# Altium PCB Arrow-ESC.PcbDoc (part 1 of 2)
Units mm, origin at the board's own origin, x right, y up, seen from the top; angles counter-clockwise.
Board outline 52 x 35 mm, 6 copper layers (Top Layer (SIG), Int1 (GND), Int2 (PWR), Int3 (SIG), Int4 (GND), Bottom Layer (SIG)), stack 1.481 mm thick; 87 components, 67 nets, 323 pads, 413 vias.
Unrouted connection lines stored in the file: 43.
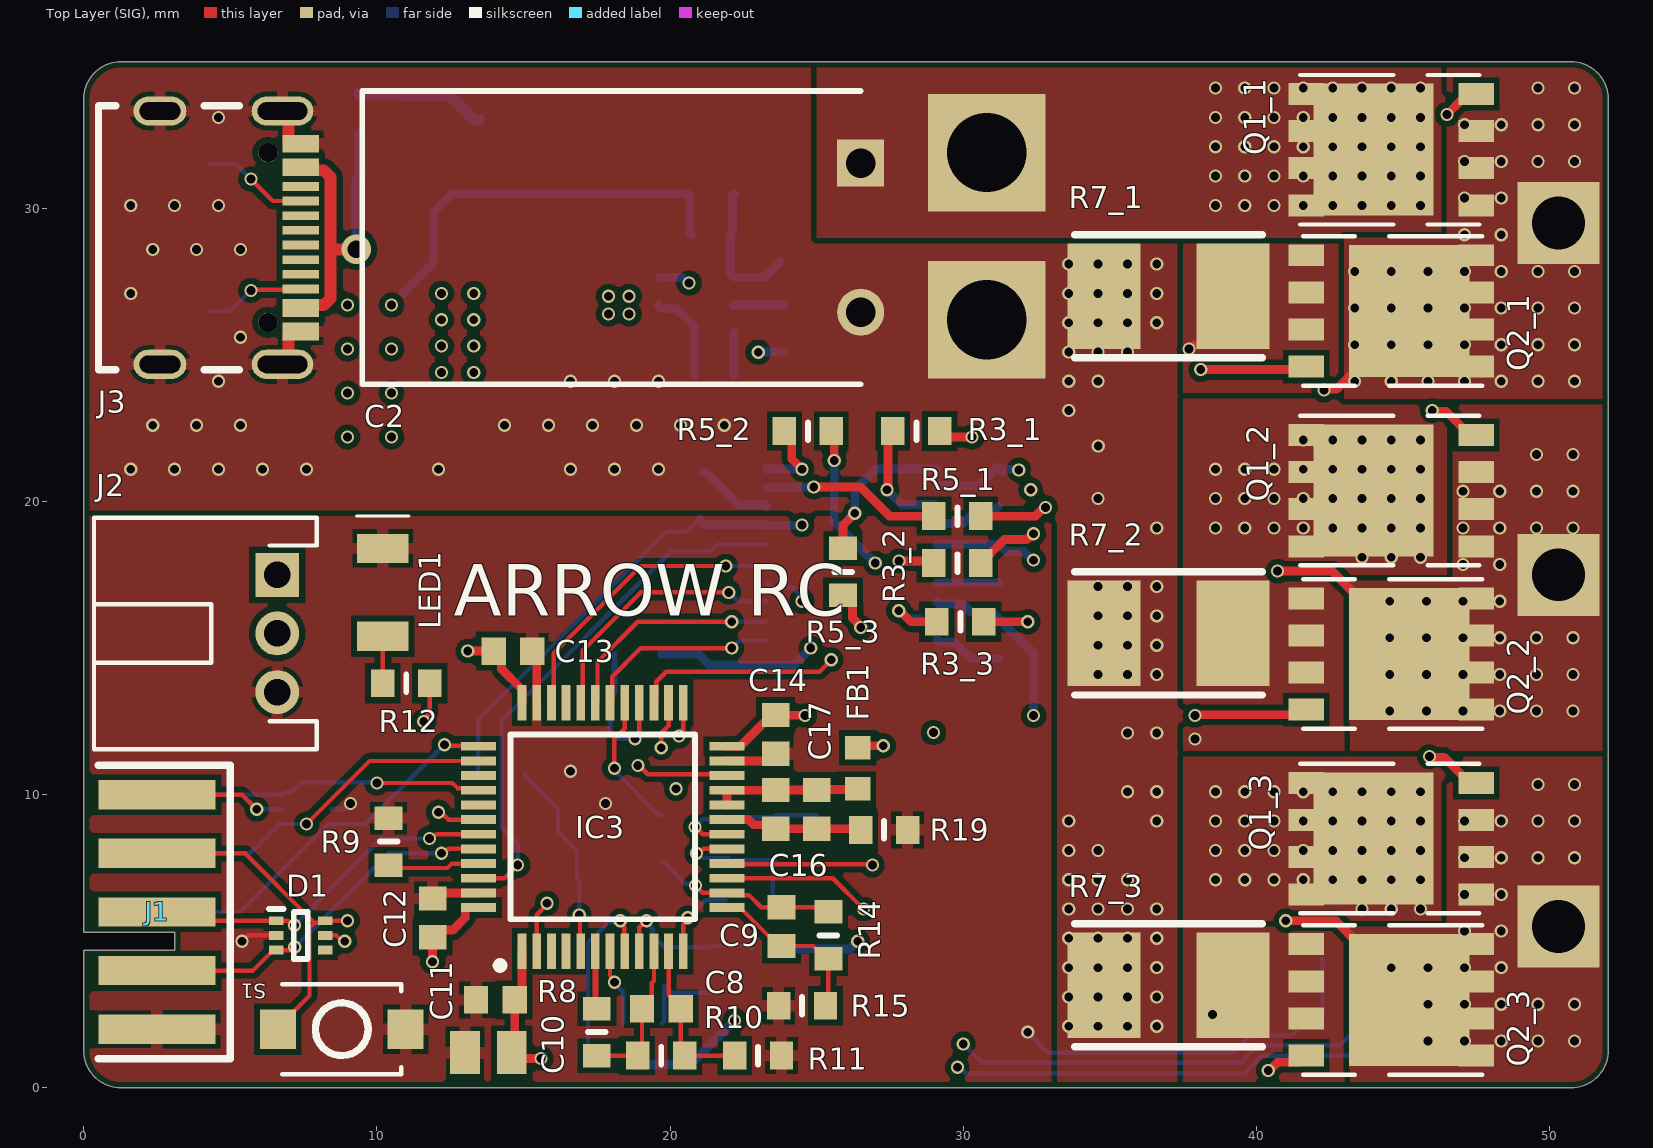
[diagram p0: Top Layer (SIG) view]
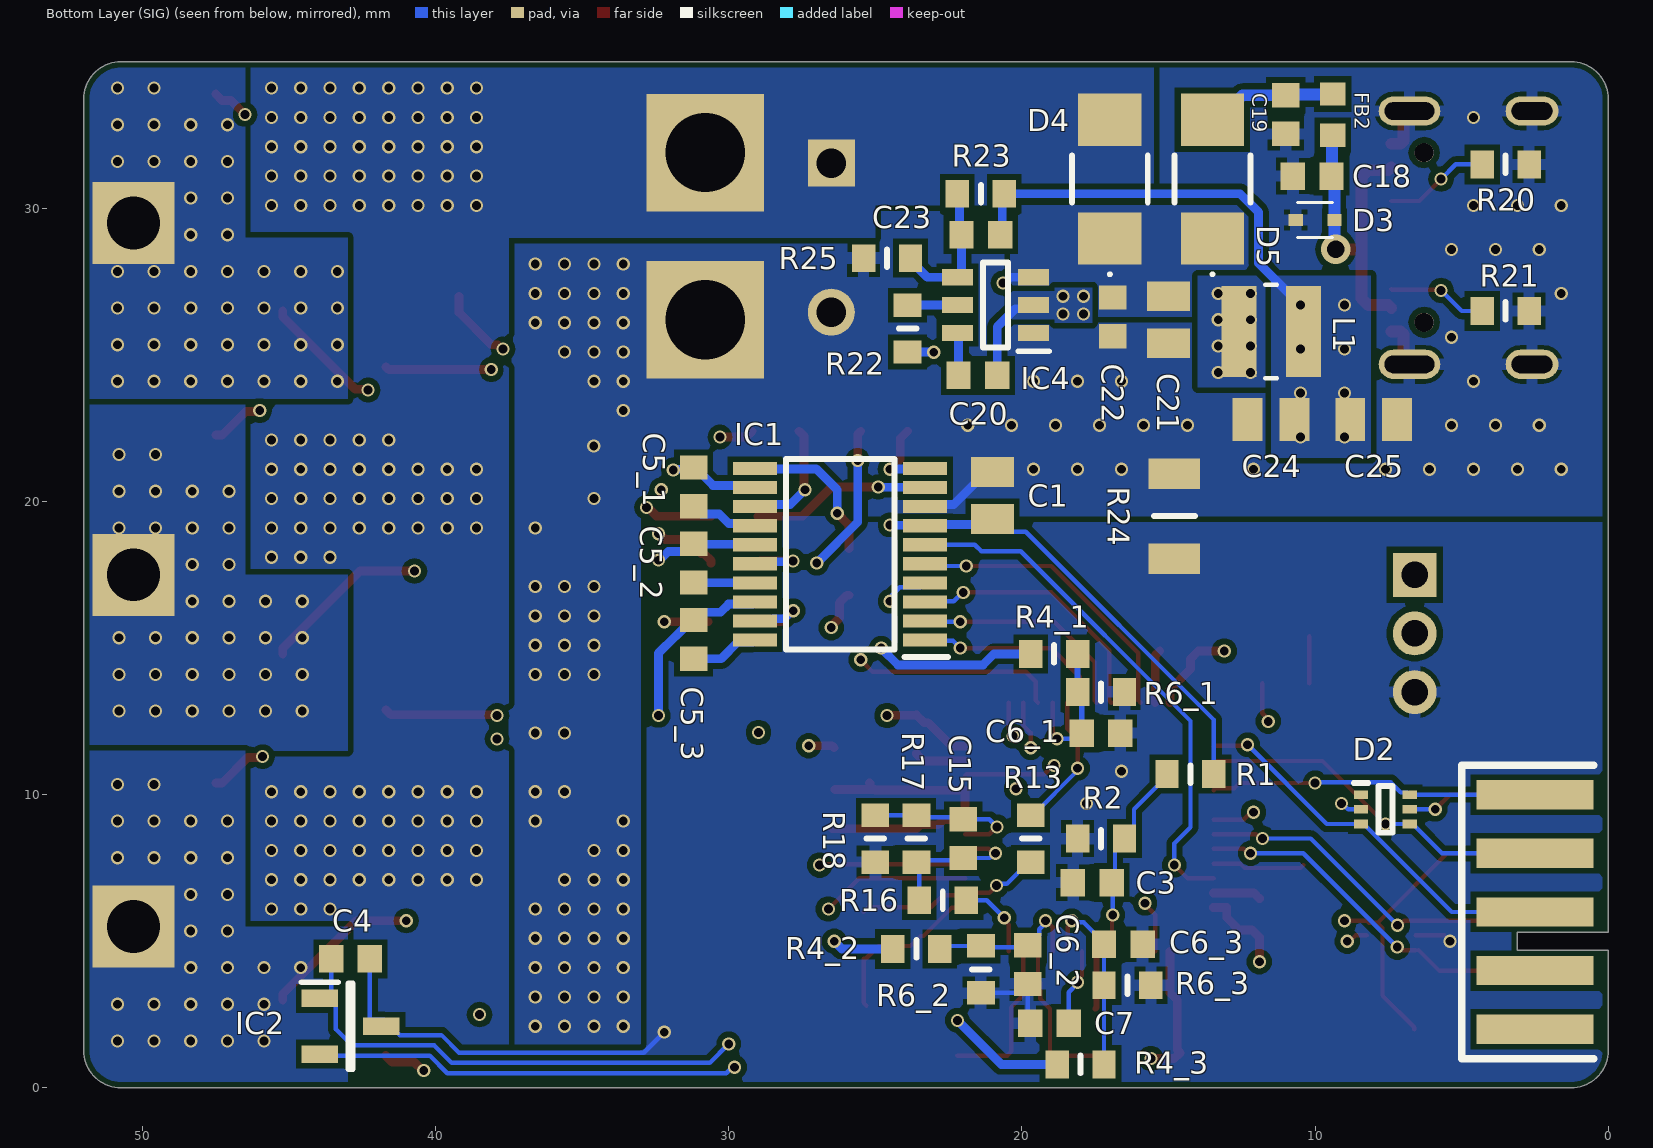
[diagram p1: Bottom Layer (SIG) view, seen from below]
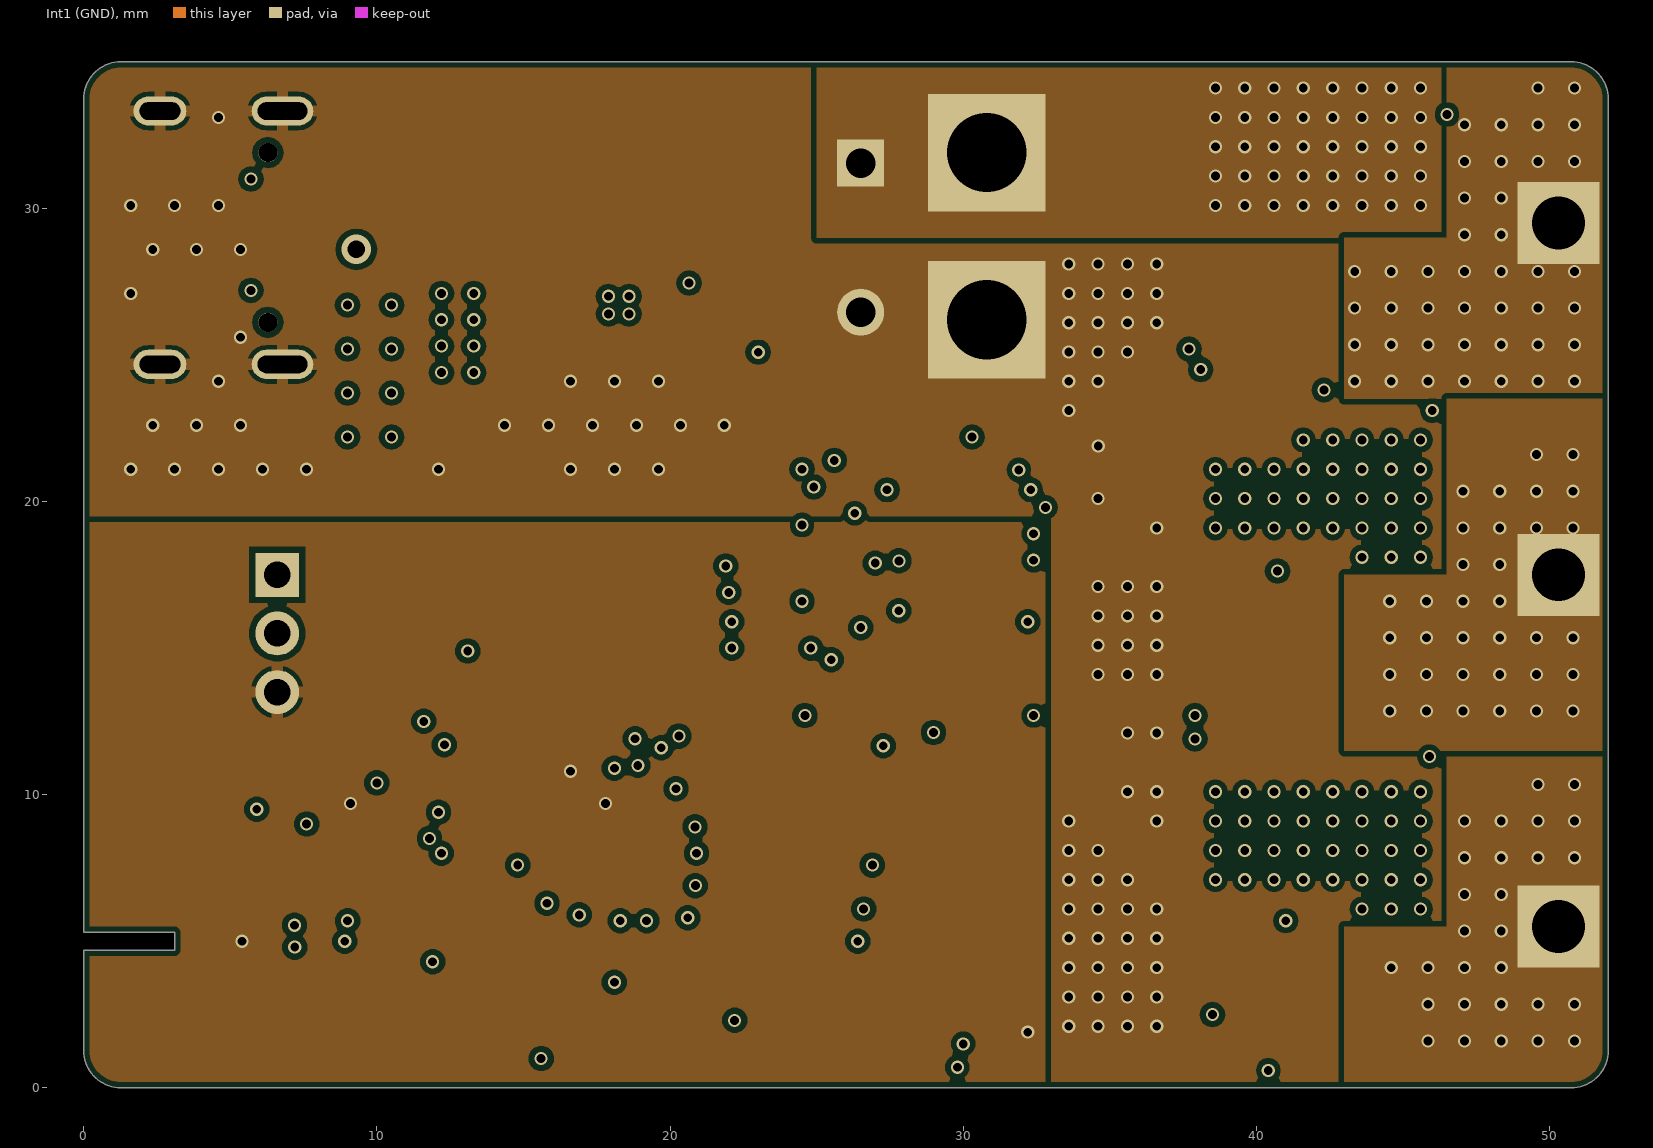
[diagram p2: Int1 (GND)]
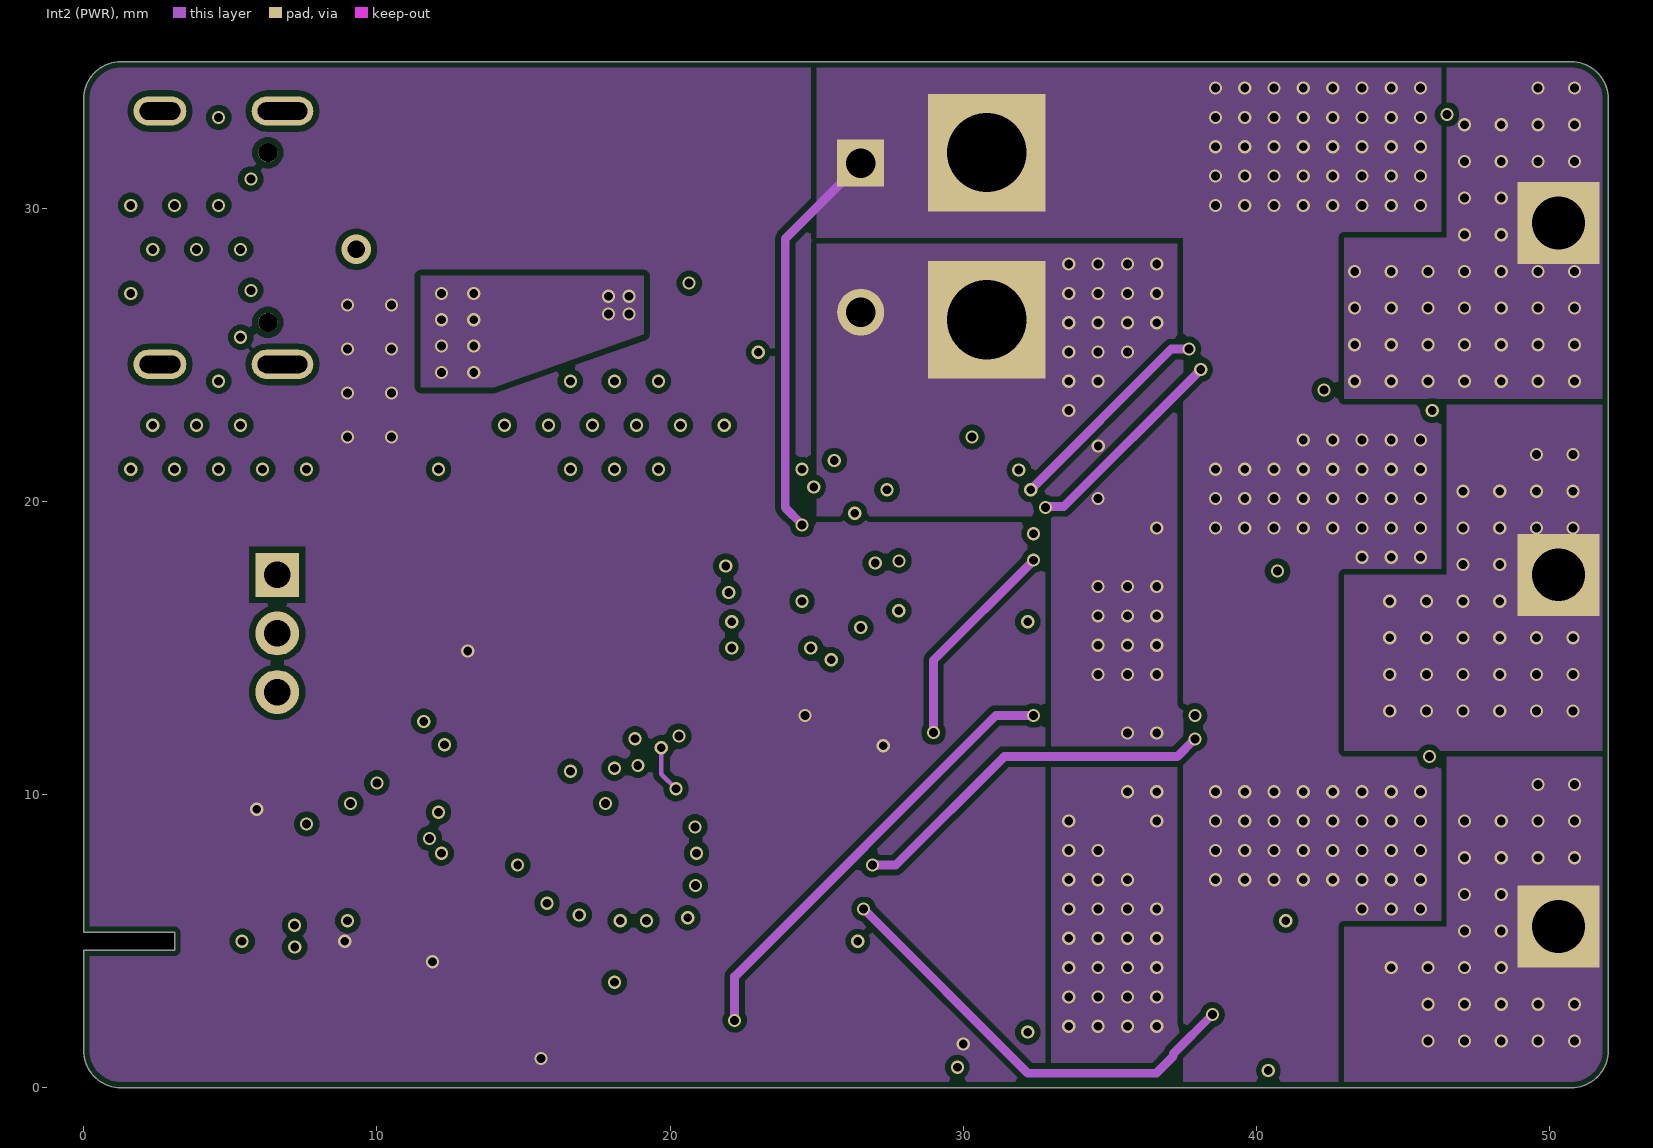
[diagram p3: Int2 (PWR)]
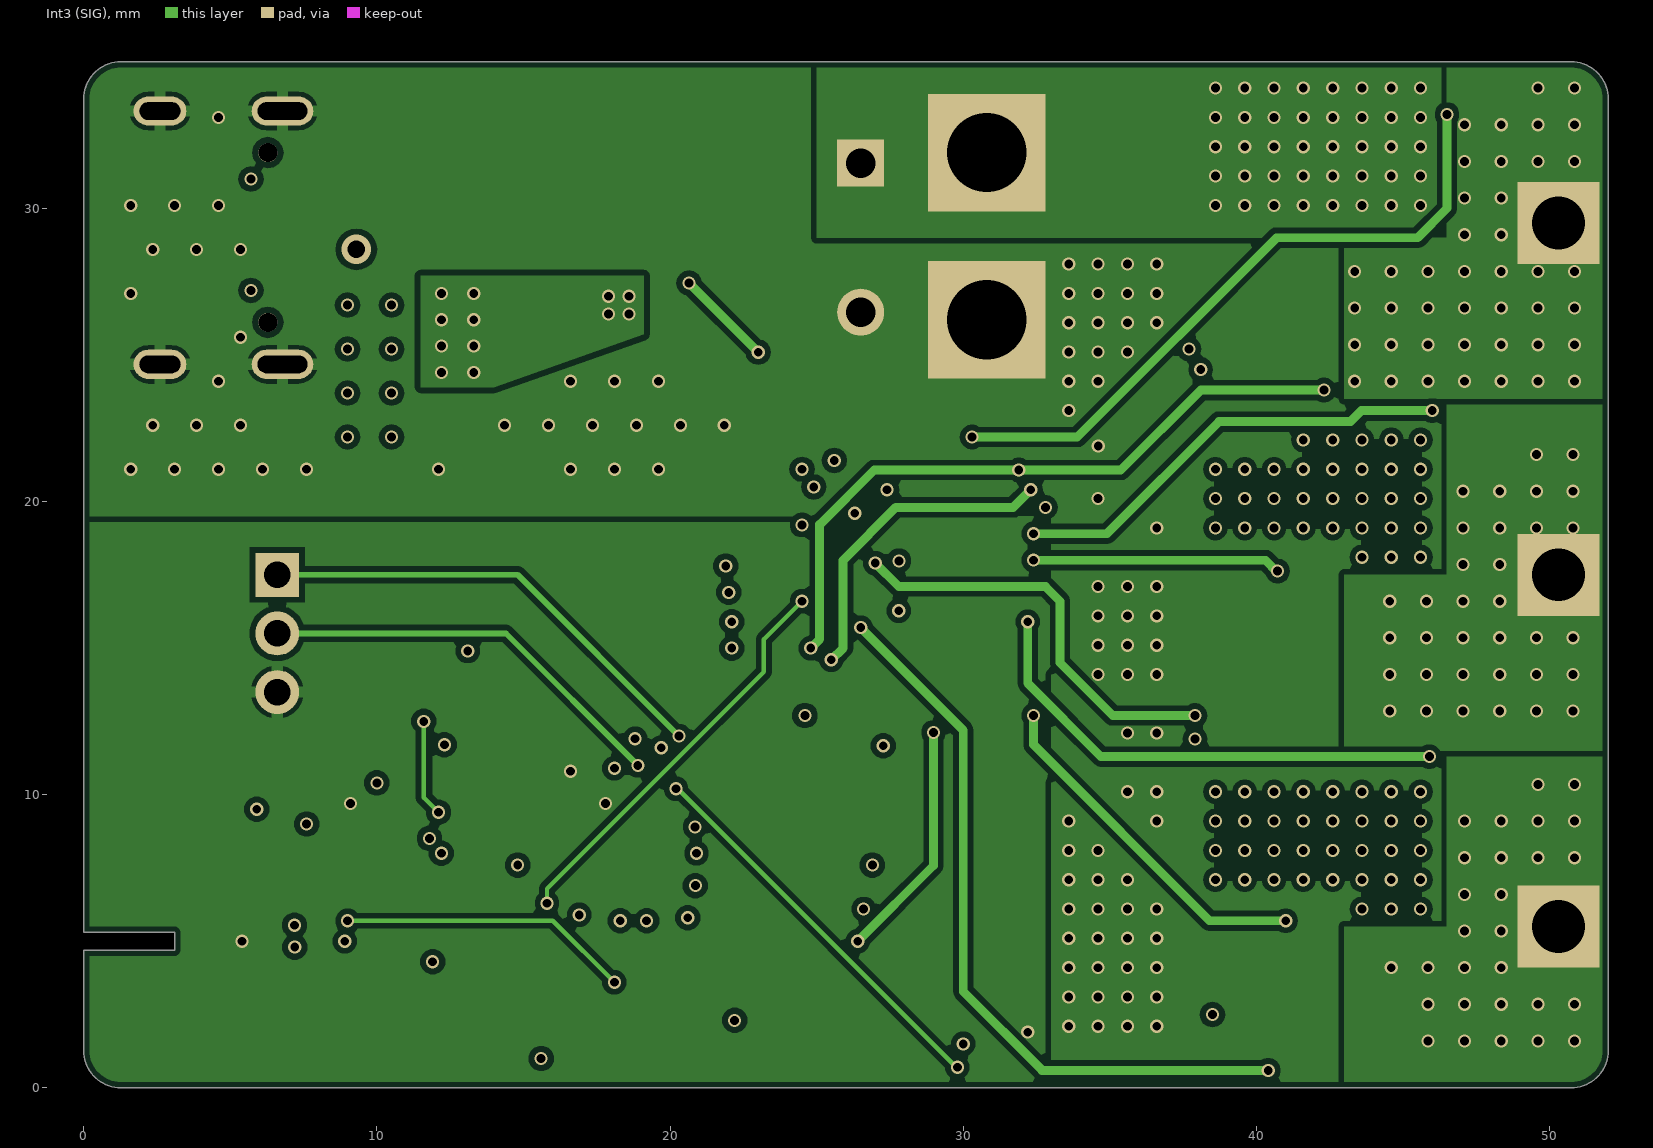
[diagram p4: Int3 (SIG)]
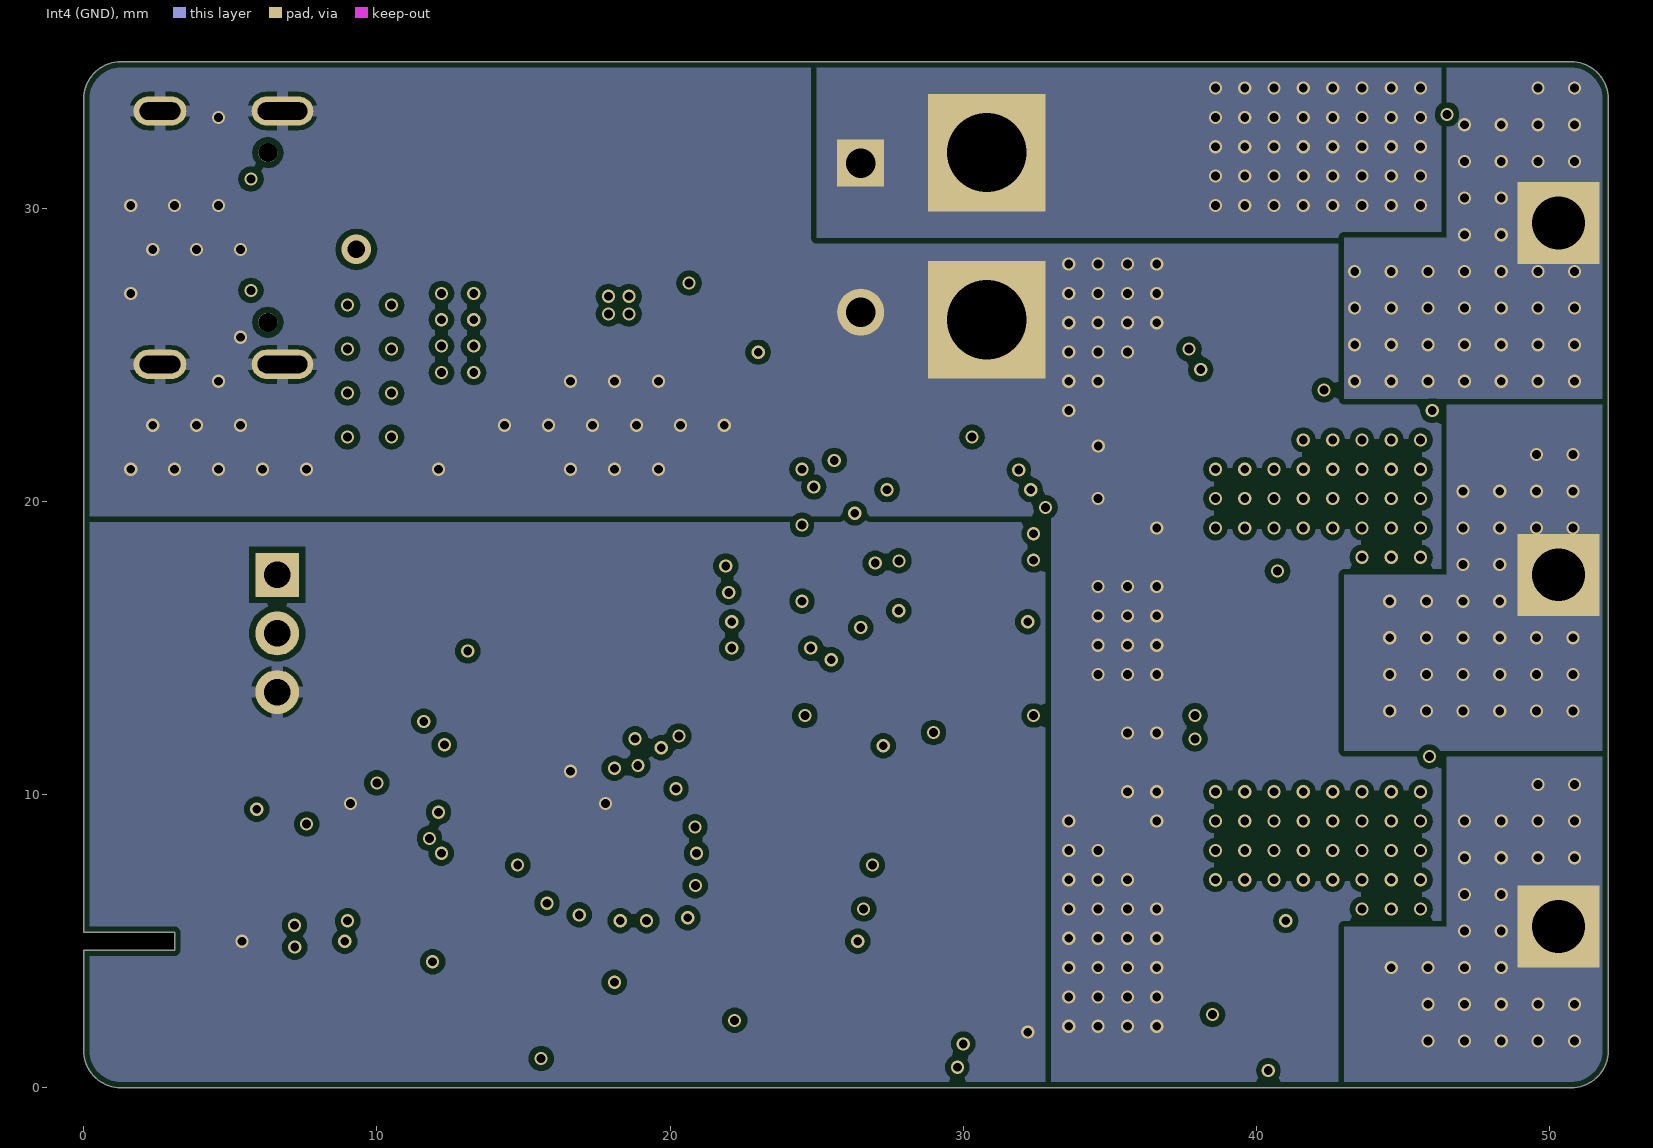
[diagram p5: Int4 (GND)]
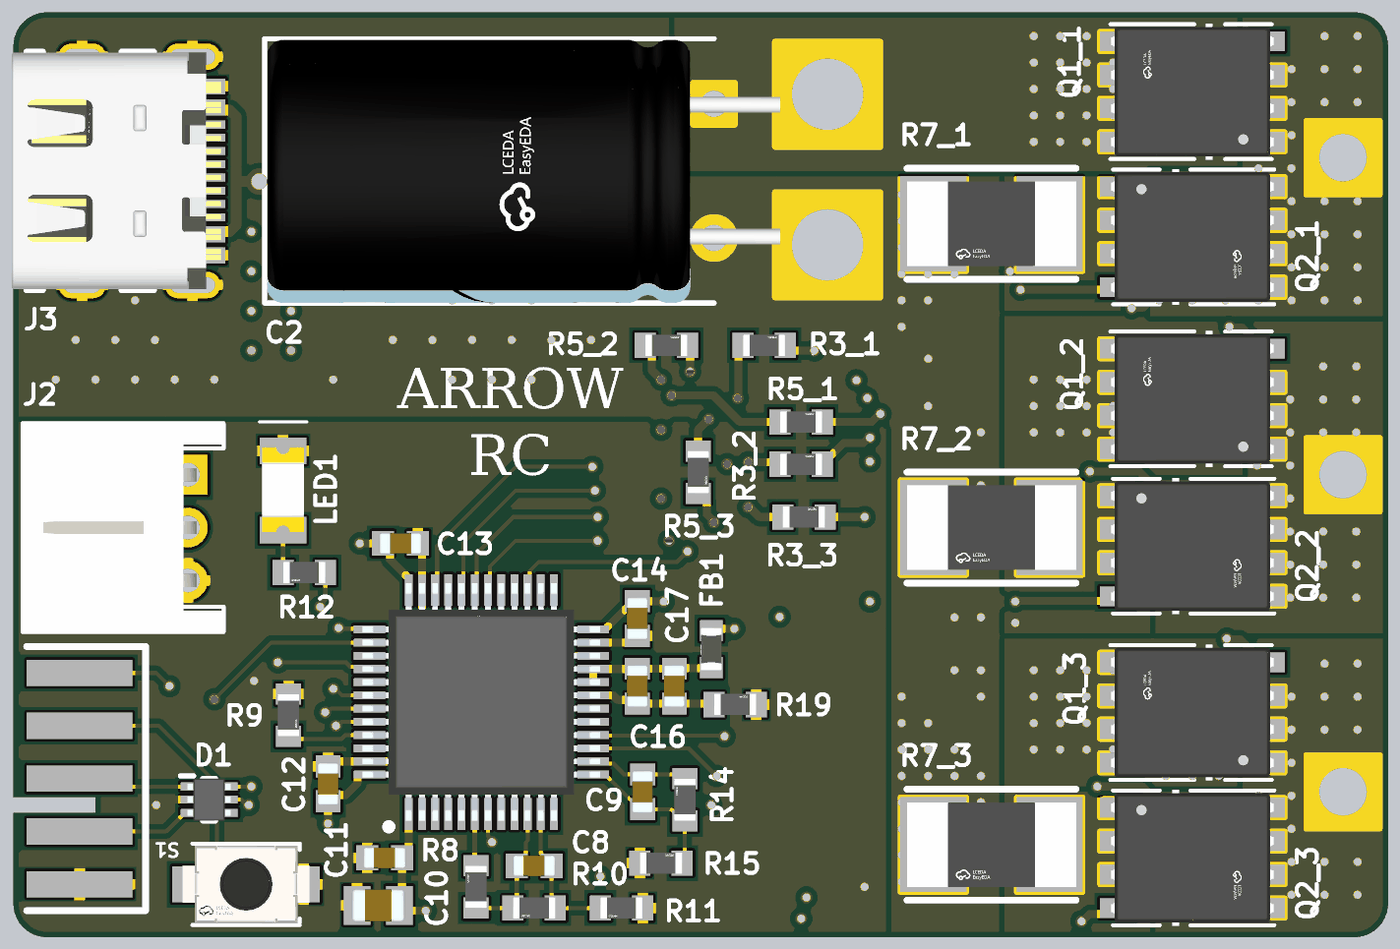
[diagram p6: 3D render of the assembled board from above, using the file's embedded part models]
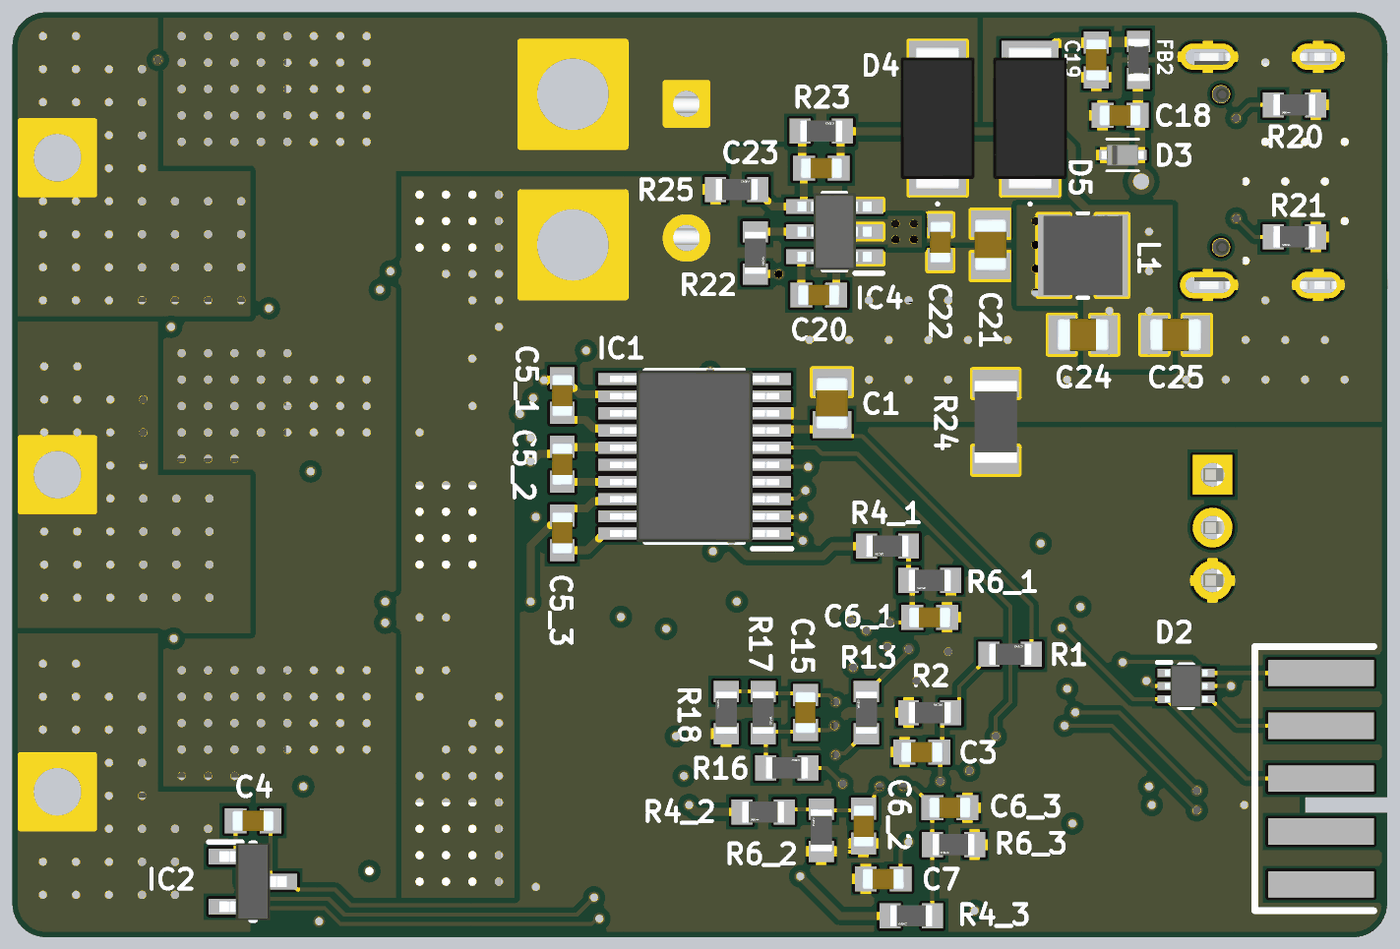
[diagram p7: 3D render of the assembled board from below, using the file's embedded part models]

## Layer stack, top to bottom
Top Solder: solder mask 0.0254, SM-001, Dk 4
Top Layer (SIG): signal copper 0.035
Dielectric 1: prepreg 0.0711, PP-006, Dk 4.1
Dielectric 2: prepreg 0.0711, PP-006, Dk 4.1
Int1 (GND): signal copper 0.0175
Dielectric 3: core 0.4572, Core-035, Dk 4.7
Int2 (PWR): signal copper 0.0175
Dielectric 4: prepreg 0.0711, PP-006, Dk 4.1
Dielectric 5: prepreg 0.0711, PP-006, Dk 4.1
Int3 (SIG): signal copper 0.0175
Dielectric 6: core 0.4572, Core-035, Dk 4.7
Int4 (GND): signal copper 0.0175
Dielectric 7: prepreg 0.0711, PP-006, Dk 4.1
Dielectric 8: prepreg 0.0711, PP-006, Dk 4.1
Bottom Layer (SIG): signal copper 0.035
Bottom Solder: solder mask 0.0254, SM-001, Dk 4

## Board outline
0,1.27 ccw(c1.27,1.27) 1.27,0 50.73,0 ccw(c50.73,1.27) 52,1.27 52,33.73 ccw(c50.73,33.73) 50.73,35 1.27,35 ccw(c1.27,33.73) 0,33.73 0,5.3 3.1,5.3 3.1,4.7 0,4.7

## Design rules (kind name [scope] priority, off if disabled: settings)
BoardOutlineClearance [All] p1: gap=0.2 ignorepadtopadclearanceinfootprint=FALSE
Clearance "Stitching NetC15_1" [IsStitchingVia and InNet('NetC15_1') vs (IsVia and (Not IsStitchingVia)) Or IsPad] p1: gap=0 ignorepadtopadclearanceinfootprint=FALSE
Clearance [All] p2: gap=0.2 ignorepadtopadclearanceinfootprint=TRUE
HoleSize [All] p1: absolutevalues=TRUE maxlimit=5 minlimit=0.025 maxpercent=80.000 minpercent=20.000
MinimumSolderMaskSliver [All] p1: minsoldermaskwidth=0.1
PolygonConnect PolygonConnect_2 [All vs isVia] p1: connectstyle=Direct reliefconductorwidth=0.254 reliefentries=4 polygonreliefangle="90 Angle" airgapwidth=0.254
PolygonConnect PolygonConnect_4 [(InNet('PGND') AND (InComponent('J3') OR InComponent('R25') OR InComponent('R20') OR InComponent('R21') OR InComponent('D3') OR InComponent('C19') OR InComponent('C18')))] p2: connectstyle=Relief reliefconductorwidth=0.4 reliefentries=4 polygonreliefangle="90 Angle" airgapwidth=0.15
PolygonConnect PolygonConnect_1 [InNetClass('High-Current')] p3: connectstyle=Direct reliefconductorwidth=0.254 reliefentries=4 polygonreliefangle="90 Angle" airgapwidth=0.254
PolygonConnect [(InNet('NetC20_1') OR InNet('NetC21_2') OR (InNet('+3V3') AND InComponent('C25') OR InComponent('C24') OR InComponent('L1')) OR InComponent('R24'))] p4: connectstyle=Direct reliefconductorwidth=0.254 reliefentries=4 polygonreliefangle="90 Angle" airgapwidth=0.127
PolygonConnect PolygonConnect_3 [All] p5: connectstyle=Relief reliefconductorwidth=0.4 reliefentries=4 polygonreliefangle="90 Angle" airgapwidth=0.15
RoutingVias [All] p1: holewidth=0.711 width=0.8 viastyle="Through Hole" minholewidth=0.3 minwidth=0.45 maxholewidth=0.711 maxwidth=1.27
SilkToSolderMaskClearance [IsPad] p1: minsilkscreentomaskgap=0.1 clearancetoexposedcopper=TRUE
SolderMaskExpansion SolderMaskExpansion_1 [IsVia] p1: expansion=0.102 istentingtop=TRUE
SolderMaskExpansion [All] p2: expansion=0.102 istentingtop=FALSE
SupplyNets "Schematic Supply Nets_7" [InNet('+3V3')] p1: voltage=0.000
SupplyNets "Schematic Supply Nets" [InNet('+3V3A')] p2: voltage=0.000
SupplyNets "Schematic Supply Nets_6" [InNet('PGND')] p3: voltage=0.000
SupplyNets "Schematic Supply Nets_5" [InNet('DGND')] p4: voltage=0.000
SupplyNets "Schematic Supply Nets_3" [InNet('AGND')] p5: voltage=0.000
SupplyNets "Schematic Supply Nets_1" [InNet('VBATT')] p6: voltage=0.000
Width [All] p1: maxlimit=0.5 minlimit=0.15 preferedwidth=0.15 minimp=50.000000 maximp=50.000000 favimp=50.000000
27 further rules are at their usual default settings.

## Classes and differential pairs
component class "Top Level": J2
component class "U_Motor Phase2": C5_2 C6_2 Q1_2 Q2_2 R3_2 R4_2 R5_2 R6_2 R7_2
net class High-Current: NetC5_1_1 NetC5_2_1 NetC5_3_1 OPAMP1_VINP OPAMP2_VINP OPAMP3_VINP PGND VBATT
channel class "Motor Phase": "U_Motor Phase1" "U_Motor Phase2" "U_Motor Phase3"
component class "U_Motor Driver": C1 C2 C3 C4 IC1 IC2 R1 R2
component class "U_Motor Phase3": C5_3 C6_3 Q1_3 Q2_3 R3_3 R4_3 R5_3 R6_3 R7_3
component class U_Buck: C18 C19 C20 C21 C22 C23 C24 C25 D3 D4 D5 FB2 IC4 J3 L1 R20 R21 R22 R23 R24 R25
component class "U_Motor Phase1": C5_1 C6_1 Q1_1 Q2_1 R3_1 R4_1 R5_1 R6_1 R7_1
component class U_STM32G4: C7 C8 C9 C10 C11 C12 C13 C14 C15 C16 C17 D1 D2 FB1 IC3 J1 LED1 R8 R9 R10 R11 R12 R13 R14 R15 R16 R17 R18 R19 S1

## Components (designator, comment, footprint, x,y, rotation, side; value= is the part's Value field where it differs from the comment)
C1 "0805,X5R,10uF,25V,10%" CAPC2012X145N 21,20.2 r90 bottom
C2 "1000uF,25V,20%" CAP-TH_BD10.0-P5.00-D1.0-FD 26.5,29 r270 top
C3 "0603,X7R,15nF,50V,10%" CAPC1608X90N 17.6,7 r180 bottom
C4 "0603,X7R,100nF,50V,10%" CAPC1608X90N 42.9,4.4 r0 bottom
C5_1 "0603,X7R,100nF,50V,10%" CAPC1608X90N 31.2,20.5 r270 bottom (schematic designator C5)
C5_2 "0603,X7R,100nF,50V,10%" CAPC1608X90N 31.2,17.9 r270 bottom (schematic designator C5)
C5_3 "0603,X7R,100nF,50V,10%" CAPC1608X90N 31.2,15.3 r270 bottom (schematic designator C5)
C6_1 "0603,X7R,15nF,50V,10%" CAPC1608X90N 17.3,12.1 r0 bottom (schematic designator C6)
C6_2 "0603,X7R,15nF,50V,10%" CAPC1608X90N 19.8,4.2 r90 bottom (schematic designator C6)
C6_3 "0603,X7R,15nF,50V,10%" CAPC1608X90N 16.54,4.9 r0 bottom (schematic designator C6)
C7 "0603,X7R,100nF,50V,10%" CAPC1608X90N 19.06,2.2 r180 bottom
C8 "0603,NP0,120pF,50V,5%" CAPC1608X90N 19.7,2.7 r180 top
C9 "0603,NP0,120pF,50V,5%" CAPC1608X90N 23.8,5.5 r90 top
C10 "0805,X5R,10uF,25V,10%" CAPC2012X145N 13.8,1.2 r0 top
C11 "0603,X7R,100nF,50V,10%" CAPC1608X90N 14.04,3 r0 top
C12 "0603,X7R,100nF,50V,10%" CAPC1608X90N 11.9,5.8 r270 top
C13 "0603,X7R,100nF,50V,10%" CAPC1608X90N 14.64,14.9 r180 top
C14 "0603,X7R,100nF,50V,10%" CAPC1608X90N 23.6,12.06 r90 top
C15 "0603,NP0,120pF,50V,5%" CAPC1608X90N 22,8.5 r270 bottom
C16 "0603,X7R,100nF,50V,10%" CAPC1608X90N 23.6,9.5 r90 top
C17 "0603,X7R,1uF,50V,10%" CAPC1608X90N 25,9.5 r90 top
C18 "0603,X7R,15nF,50V,10%" CAPC1608X90N 10.1,31.1 r180 bottom
C19 "0603,X7R,100nF,50V,10%" CAPC1608X90N 11,33.2 r90 bottom
C20 "0603,X7R,100nF,50V,10%" CAPC1608X90N 21.5,24.3 r0 bottom
C21 "0805,X5R,10uF,25V,10%" CAPC2012X145N 15,26.2 r90 bottom
C22 "0603,X7R,100nF,50V,10%" CAPC1608X90N 16.9,26.3 r90 bottom
C23 "0603,NP0,56pF,50V,5%" CAPC1608X90N 21.4,29.1 r180 bottom
C24 "0805,X5R,22uF,25V,20%" CAPC2012X145N 11.5,22.8 r180 bottom
C25 "0805,X5R,22uF,25V,20%" CAPC2012X145N 8,22.8 r0 bottom
D1 "DT1446-04V-7" SOTFL50P162X60-6N 7.4,5.2 r0 top
D2 "DT1446-04V-7" SOTFL50P162X60-6N 7.6,9.5 r180 bottom
D3 "LESD5D5.0CT1G" LESD5D50CT1G 10,29.6 r180 bottom
D4 "SK34A-LTP" SK34ALTP 17,31 r270 bottom
D5 "SK34A-LTP" SK34ALTP 13.5,31 r270 bottom
FB1 "600R@100MHz" L0603 26.4,10.9 r90 top
FB2 "600R@100MHz" L0603 9.4,33.2 r90 bottom
IC1 "DRV8300DPWR" SOP65P640X120-20N 26.2,18.2 r0 bottom
IC2 "TMP236A2DBZR" SOT95P237X112-3N 42.9,2.1 r180 bottom
IC3 "STM32G431CBT6" QFP50P900X900X160-48N 17.7,8.9 r90 top
IC4 "TPS54202HDDCR" SOT95P280X100-6N 20.9,26.7 r0 bottom
J1 "STLINK-SW" 009159010061911 2.5,2 r90 top
J2 "S3B-PH-K-S-(LF)(SN)" CONN-TH_3P-P2.00_S3B-PH-K-S-LF-SN 6.6,15.5 r270 top
J3 "GT-USB-7010ASV" USB-C-SMD_G-SWITCH_GT-USB-7010ASV 5,29 r270 top
L1 "2.5A,10uH,135mR,20%" IND-SMD_L3.0-W3.0_FTC303020D 11.5,25.8 r180 bottom
LED1 "1206,GREEN" LEDC3216X120N 10.2,16.9 r270 top
Q1_1 "SIR182DP-T1-RE3" POWERPAK-SO-8_L5.9-W4.9-P1.27-LS6.2-BL 44.6,32 r90 top (schematic designator Q1)
Q1_2 "SIR182DP-T1-RE3" POWERPAK-SO-8_L5.9-W4.9-P1.27-LS6.2-BL 44.6,20.37 r90 top (schematic designator Q1)
Q1_3 "SIR182DP-T1-RE3" POWERPAK-SO-8_L5.9-W4.9-P1.27-LS6.2-BL 44.6,8.5 r90 top (schematic designator Q1)
Q2_1 "SIR182DP-T1-RE3" POWERPAK-SO-8_L5.9-W4.9-P1.27-LS6.2-BL 44.6,26.5 r270 top (schematic designator Q2)
Q2_2 "SIR182DP-T1-RE3" POWERPAK-SO-8_L5.9-W4.9-P1.27-LS6.2-BL 44.6,14.8 r270 top (schematic designator Q2)
Q2_3 "SIR182DP-T1-RE3" POWERPAK-SO-8_L5.9-W4.9-P1.27-LS6.2-BL 44.6,3 r270 top (schematic designator Q2)
R1 "0603,4.7K,1%" RESC1608X55N 14.25,10.7 r180 bottom
R2 "0603,1K,1%" RESC1608X55N 17.3,8.5 r180 bottom
R3_1 "0603,22R,1%" RESC1608X55N 28.4,22.4 r0 top (schematic designator R3)
R3_2 "0603,22R,1%" RESC1608X55N 29.8,17.9 r0 top (schematic designator R3)
R3_3 "0603,22R,1%" RESC1608X55N 29.9,15.9 r0 top (schematic designator R3)
R4_1 "0603,4.7K,1%" RESC1608X55N 18.9,14.8 r0 bottom (schematic designator R4)
R4_2 "0603,4.7K,1%" RESC1608X55N 23.6,4.74 r0 bottom (schematic designator R4)
R4_3 "0603,4.7K,1%" RESC1608X55N 18,0.8 r0 bottom (schematic designator R4)
R5_1 "0603,22R,1%" RESC1608X55N 29.8,19.5 r0 top (schematic designator R5)
R5_2 "0603,22R,1%" RESC1608X55N 24.7,22.4 r0 top (schematic designator R5)
R5_3 "0603,22R,1%" RESC1608X55N 25.9,17.6 r270 top (schematic designator R5)
R6_1 "0603,1K,1%" RESC1608X55N 17.3,13.5 r0 bottom (schematic designator R6)
R6_2 "0603,1K,1%" RESC1608X55N 21.4,4.04 r90 bottom (schematic designator R6)
R6_3 "0603,1K,1%" RESC1608X55N 16.4,3.5 r0 bottom (schematic designator R6)
R7_1 "2512,1mR,1%" RES-SMD_L6.4-W3.2_RLP25 37,27 r0 top (schematic designator R7)
R7_2 "2512,1mR,1%" RES-SMD_L6.4-W3.2_RLP25 37,15.5 r0 top (schematic designator R7)
R7_3 "2512,1mR,1%" RES-SMD_L6.4-W3.2_RLP25 37,3.5 r0 top (schematic designator R7)
R8 "0603,0R,5%" RESC1608X55N 17.5,1.9 r90 top
R9 "0603,10K,1%" RESC1608X55N 10.4,8.4 r270 top
R10 "0603,100K,1%" RESC1608X55N 19.7,1.1 r180 top
R11 "0603,1K,1%" RESC1608X55N 23,1.1 r180 top
R12 "0603,330R,1%" RESC1608X55N 11,13.8 r180 top
R13 "0603,0R,5%" RESC1608X55N 19.7,8.5 r90 bottom
R14 "0603,100K,1%" RESC1608X55N 25.4,5.2 r90 top
R15 "0603,1K,1%" RESC1608X55N 24.5,2.8 r0 top
R16 "0603,0R,5%" RESC1608X55N 22.7,6.4 r180 bottom
R17 "0603,100K,1%" RESC1608X55N 23.6,8.5 r270 bottom
R18 "0603,1K,1%" RESC1608X55N 25,8.5 r90 bottom
R19 "0603,0R,5%" RESC1608X55N 27.3,8.8 r0 top
R20 "0603,5.1K,1%" RESC1608X55N 3.5,31.5 r0 bottom
R21 "0603,5.1K,1%" RESC1608X55N 3.5,26.5 r0 bottom
R22 "0603,510K,1%" RESC1608X55N 23.9,25.9 r270 bottom
R23 "0603,100K,1%" RESC1608X55N 21.4,30.5 r180 bottom
R24 "1206,0R,1%" RESC3116X65N 14.8,19.5 r270 bottom
R25 "0603,22.1K,1%" RESC1608X55N 24.6,28.3 r180 bottom
S1 "TS-1088-AR02016" SW-SMD_L3.9-W3.0-P4.45 8.8,2 r180 top

## Footprints (in the part's own frame and the unit in brackets; to place one, negate y for a bottom-side part, rotate by r counter-clockwise, add the part's x,y. Pads: shape width x height; smd on the part's side, far side on the other; paste and mask are expansions set on the pad)
009159010061911 [mm]
  rect 1x4 smd: 1(0,0) 2(2,0) 3(4,0) 4(6,0) 5(8,0)
  rect 1x4 smd far side: 6(0,0) 7(2,0) 8(4,0) 9(6,0) 10(8,0)
  silkscreen extent -1,-2.5 9,2
CAP-TH_BD10.0-P5.00-D1.0-FD [mm]
  rect 1.6x1.6 hole 1: 1(-2.54,0)
  round 1.6 hole 1: 2(2.54,0)
  silkscreen extent -5,-17 5,0, body extent -5,-16.91 5,2.5, height 10
CAPC1608X90N [mm]
  rect 0.83x0.94 smd: 1(-0.66,0) 2(0.66,0)
  body extent -0.8,-0.4 0.8,0.4, height 0.9
CAPC2012X145N [mm]
  rect 1.02x1.47 smd: 1(-0.8,0) 2(0.8,0)
  body extent -1,-0.63 1,0.63, height 1.45
CONN-TH_3P-P2.00_S3B-PH-K-S-LF-SN [mm]
  rect 1.5x1.5 hole 0.9: 1(-2,0)
  round 1.5 hole 0.9: 2(0,0) 3(2,0)
  silkscreen extent -3.95,-6.25 3.95,1.35, body extent -3.95,-6.17 3.95,1.43, height 4.8
IND-SMD_L3.0-W3.0_FTC303020D [mm]
  rect 1.2x3.1 smd: 1(-1.1,0) 2(1.1,0)
  silkscreen extent -0.2,-1.6 0.2,1.6, body extent -1.5,-1.5 1.5,1.51, height 2
L0603 [mm]
  rect 0.8x0.86 smd: 1(-0.7,0) 2(0.7,0)
  body extent -0.8,-0.4 0.8,0.4, height 0.5
LEDC3216X120N [mm]
  rect 1x1.75 smd: 1(-1.5,0) 2(1.5,0)
  silkscreen extent -2.6,-0.9 -2.6,0.9, body extent -1.63,-0.8 1.57,0.8, height 1.1
LESD5D50CT1G [mm]
  rect 0.48x0.4 smd: 1(-0.66,0) 2(0.66,0)
  silkscreen extent -0.6,-0.6 0.6,0.6, body extent -0.8,-0.4 0.8,0.4, height 0.6
POWERPAK-SO-8_L5.9-W4.9-P1.27-LS6.2-BL [mm]
  rect 0.75x1.2 smd: 1(-1.9,-2.9) 2(-0.63,-2.9) 3(0.63,-2.9) 4(1.9,-2.9) 5(1.9,2.9) 6(0.63,2.9) 7(-0.63,2.9) 8(-1.9,2.9)
  rect 4.5x4.1 smd: 8(0,0.61)
  silkscreen extent -2.55,-3 2.55,3.1, body extent -2.58,-3.08 2.58,3.08, height 1.06
QFP50P900X900X160-48N [mm]
  rect 1.2x0.3 smd: 1(-4.238,2.75) 2(-4.238,2.25) 3(-4.238,1.75) 4(-4.238,1.25) 5(-4.238,0.75) 6(-4.238,0.25) 7(-4.238,-0.25) 8(-4.238,-0.75) 9(-4.238,-1.25) 10(-4.238,-1.75) 11(-4.238,-2.25) 12(-4.238,-2.75) 25(4.238,-2.75) 26(4.238,-2.25) 27(4.238,-1.75) 28(4.238,-1.25) 29(4.238,-0.75) 30(4.238,-0.25) 31(4.238,0.25) 32(4.238,0.75) 33(4.238,1.25) 34(4.238,1.75) 35(4.238,2.25) 36(4.238,2.75)
  rect 0.3x1.2 smd: 13(-2.75,-4.238) 14(-2.25,-4.238) 15(-1.75,-4.238) 16(-1.25,-4.238) 17(-0.75,-4.238) 18(-0.25,-4.238) 19(0.25,-4.238) 20(0.75,-4.238) 21(1.25,-4.238) 22(1.75,-4.238) 23(2.25,-4.238) 24(2.75,-4.238) 37(2.75,4.238) 38(2.25,4.238) 39(1.75,4.238) 40(1.25,4.238) 41(0.75,4.238) 42(0.25,4.238) 43(-0.25,4.238) 44(-0.75,4.238) 45(-1.25,4.238) 46(-1.75,4.238) 47(-2.25,4.238) 48(-2.75,4.238)
  silkscreen extent -4.85,-3.15 3.15,3.62, body extent -4.5,-4.5 4.5,4.5, height 1.6
RES-SMD_L6.4-W3.2_RLP25 [mm]
  rect 2.5x3.6 smd: 1(-2.2,0) 2(2.2,0)
  silkscreen extent -3.2,-2.1 3.2,2.1, body extent -3.2,-1.6 3.2,1.6, height 0.54
RESC1608X55N [mm]
  rect 0.8x0.95 smd: 1(-0.8,0) 2(0.8,0)
  silkscreen extent 0,-0.3 0,0.3, body extent -0.8,-0.4 0.8,0.4, height 0.55
RESC3116X65N [mm]
  rect 1.05x1.75 smd: 1(-1.45,0) 2(1.45,0)
  silkscreen extent 0,-0.7 0,0.7, body extent -1.55,-0.8 1.55,0.8, height 0.65
SK34ALTP [mm]
  rect 1.78x2.16 smd: 1(2.025,0) 2(-2.025,0)
  silkscreen extent -0.8,-1.29 3.3,1.29, body extent -2.7,-1.4 2.7,1.4, height 2.26
SOP65P640X120-20N [mm]
  rect 1.5x0.45 smd: 1(-2.9,2.925) 2(-2.9,2.275) 3(-2.9,1.625) 4(-2.9,0.975) 5(-2.9,0.325) 6(-2.9,-0.325) 7(-2.9,-0.975) 8(-2.9,-1.625) 9(-2.9,-2.275) 10(-2.9,-2.925) 11(2.9,-2.925) 12(2.9,-2.275) 13(2.9,-1.625) 14(2.9,-0.975) 15(2.9,-0.325) 16(2.9,0.325) 17(2.9,0.975) 18(2.9,1.625) 19(2.9,2.275) 20(2.9,2.925)
  silkscreen extent -3.67,-3.25 1.85,3.5, body extent -3.2,-3.25 3.2,3.25, height 1.13
SOT95P237X112-3N [mm]
  rect 1.25x0.6 smd: 1(-1.05,0.95) 2(-1.05,-0.95) 3(1.05,0)
  silkscreen extent -1.68,-1.46 0.08,1.5, body extent -1.27,-1.46 1.27,1.46, height 1
SOT95P280X100-6N [mm]
  rect 1.05x0.55 smd: 1(-1.3,0.95) 2(-1.3,0) 3(-1.3,-0.95) 4(1.3,-0.95) 5(1.3,0) 6(1.3,0.95)
  silkscreen extent -1.83,-1.45 0.43,1.58, body extent -1.4,-1.45 1.4,1.45, height 1
SOTFL50P162X60-6N [mm]
  rect 0.492x0.3 smd: 1(-0.834,0.5) 2(-0.834,0) 3(-0.834,-0.5) 4(0.834,-0.5) 5(0.834,0) 6(0.834,0.5)
  silkscreen extent -1.08,-0.8 0.24,0.9, body extent -0.81,-0.8 0.81,0.8, height 0.6
SW-SMD_L3.9-W3.0-P4.45 [mm]
  rect 1.23x1.36 smd: 1(-2.18,0) 2(2.18,0)
  silkscreen extent -2.03,-1.54 2.03,1.54, body extent -2.4,-1.45 2.4,1.45, height 1.95
USB-C-SMD_G-SWITCH_GT-USB-7010ASV [mm]
  rrect100% 1x2.1 hole 1.7 slot 0.6 at 0 deg: 1(-4.32,1.78) 2(4.32,1.78)
  rrect100% 1x1.8 hole 1.4 slot 0.6 at 0 deg: 3(4.32,-2.4) 4(-4.32,-2.4)
  rect 0.6x1.24 smd: A1B12(-3.2,2.4) A4B9(-2.4,2.4) B1A12(3.2,2.4) B4A9(2.4,2.4)
  rect 0.3x1.24 smd: A5(-1.25,2.4) A6(-0.25,2.4) A7(0.25,2.4) A8(1.25,2.4) B5(1.75,2.4) B6(0.75,2.4) B7(-0.75,2.4) B8(-1.75,2.4)
  round 0.65 hole 0.65: Un1(2.89,1.28) Un2(-2.9,1.28)
  silkscreen extent -4.5,-4.5 4.5,0.3, body extent -4.47,-5.05 4.47,2.85, height 3.16

## Part data
C1 C10 C21: library part CC0805KKX5R8BB106, "10 µF ±10% 25V Ceramic Capacitor X5R 0805 (2012 Metric)", LCSC Part #=C89831, Manufacturer_Name=YAGEO, Mouser Part Number=603-CC805KKX5R8BB106, Arrow Part Number=CC0805KKX5R8BB106, Arrow Price/Stock=https://www.arrow.com/en/products/cc0805kkx5r8bb106/yageo?utm_currency=USD&region=nac, Datasheet Link=https://www.yageo.com/upload/media/product/productsearch/datasheet/mlcc/UPY-GPHC_X5R_4V-to-50V_27.pdf, Height=1.45mm, Manufacturer_Part_Number=CC0805KKX5R8BB106, Mouser Price/Stock=https://www.mouser.co.uk/ProductDetail/YAGEO/CC0805KKX5R8BB106?qs=57cj7OiSijm89pM64t1AGQ%3D%3D
C2: library part 25PK1000MEFC10*16, "1000uF 25V ±20% 870mA@120Hz Through Hole,D10xL16mm Aluminum Electrolytic Capacitors - Leaded ROHS", LCSC Part #=C109451
C3 C6_1 C6_2 C6_3 C18: library part CC0603KRX7R9BB153, "50V 15nF X7R ±10% 0603 Multilayer Ceramic Capacitors MLCC - SMD/SMT ROHS", Arrow Part Number=CC0603KRX7R9BB104, LCSC Part #=C107076, Manufacturer_Name=YAGEO, Mouser Part Number=603-CC603KRX7R9BB104, Arrow Price/Stock=https://www.arrow.com/en/products/cc0603krx7r9bb104/yageo?utm_currency=USD&region=europe, Datasheet Link=https://componentsearchengine.com/Datasheets/2/CC0603KRX7R9BB104.pdf, Height=0.9mm, Manufacturer_Part_Number=CC0603KRX7R9BB153, Mouser Price/Stock=https://www.mouser.co.uk/ProductDetail/YAGEO/CC0603KRX7R9BB104?qs=vTakOoo5QyLvVCYM2ge8LQ%3D%3D
C4 C5_1 C5_2 C5_3 C7 C11 C12 C13 C14 C16 C19 C20 C22: library part CC0603KRX7R9BB104, "50V 100nF X7R ±10% 0603 Multilayer Ceramic Capacitors MLCC - SMD/SMT ROHS", LCSC Part #=C14663, Manufacturer_Name=YAGEO, Mouser Part Number=603-CC603KRX7R9BB104, Arrow Part Number=CC0603KRX7R9BB104, Arrow Price/Stock=https://www.arrow.com/en/products/cc0603krx7r9bb104/yageo?utm_currency=USD&region=europe, Datasheet Link=https://componentsearchengine.com/Datasheets/2/CC0603KRX7R9BB104.pdf, Height=0.9mm, Manufacturer_Part_Number=CC0603KRX7R9BB104, Mouser Price/Stock=https://www.mouser.co.uk/ProductDetail/YAGEO/CC0603KRX7R9BB104?qs=vTakOoo5QyLvVCYM2ge8LQ%3D%3D
C8 C9 C15: library part CC0603JRNPO9BN121, "50V 120pF NP0 ±5% 0603 Multilayer Ceramic Capacitors MLCC - SMD/SMT ROHS", Arrow Part Number=CC0603KRX7R9BB104, LCSC Part #=C107035, Manufacturer_Name=YAGEO, Mouser Part Number=603-CC603KRX7R9BB104, Arrow Price/Stock=https://www.arrow.com/en/products/cc0603krx7r9bb104/yageo?utm_currency=USD&region=europe, Datasheet Link=https://componentsearchengine.com/Datasheets/2/CC0603KRX7R9BB104.pdf, Height=0.9mm, Manufacturer_Part_Number=CC0603JRNPO9BN121, Mouser Price/Stock=https://www.mouser.co.uk/ProductDetail/YAGEO/CC0603KRX7R9BB104?qs=vTakOoo5QyLvVCYM2ge8LQ%3D%3D
C17: library part CC0603KRX7R9BB105, "50V 1uF X7R ±10% 0603 Multilayer Ceramic Capacitors MLCC - SMD/SMT ROHS", LCSC Part #=C559769, Manufacturer_Name=YAGEO, Mouser Part Number=603-CC603KRX7R9BB105, Arrow Part Number=CC0603KRX7R9BB105, Arrow Price/Stock=https://www.arrow.com/en/products/cc0603krx7r9bb105/yageo?utm_currency=USD&region=nac, Datasheet Link=https://www.yageo.com/upload/media/product/app/datasheet/mlcc/upy-gphc_x7r_6_3v-to-250v.pdf, Height=0.95mm, Manufacturer_Part_Number=CC0603KRX7R9BB105, Mouser Price/Stock=https://www.mouser.co.uk/ProductDetail/YAGEO/CC0603KRX7R9BB105?qs=6wERJjOp3mmF17%252BYi8cgJQ%3D%3D
C23: library part CC0603JRNPO9BN560, "50V 56pF NP0 ±5% 0603 Ceramic Capacitors RoHS", Arrow Part Number=CC0603KRX7R9BB105, LCSC Part #=C107053, Manufacturer_Name=YAGEO, Mouser Part Number=603-CC603KRX7R9BB105, Arrow Price/Stock=https://www.arrow.com/en/products/cc0603krx7r9bb105/yageo?utm_currency=USD&region=nac, Datasheet Link=https://www.yageo.com/upload/media/product/app/datasheet/mlcc/upy-gphc_x7r_6_3v-to-250v.pdf, Height=0.95mm, Manufacturer_Part_Number=CC0603JRNPO9BN560, Mouser Price/Stock=https://www.mouser.co.uk/ProductDetail/YAGEO/CC0603KRX7R9BB105?qs=6wERJjOp3mmF17%252BYi8cgJQ%3D%3D
C24 C25: library part CC0805MKX5R8BB226, "25V 22uF X5R ±20% 0805 Ceramic Capacitors RoHS", Arrow Part Number=CC0805KKX5R8BB106, LCSC Part #=C784585, Manufacturer_Name=YAGEO, Mouser Part Number=603-CC805KKX5R8BB106, Arrow Price/Stock=https://www.arrow.com/en/products/cc0805kkx5r8bb106/yageo?utm_currency=USD&region=nac, Datasheet Link=https://www.yageo.com/upload/media/product/productsearch/datasheet/mlcc/UPY-GPHC_X5R_4V-to-50V_27.pdf, Height=1.45mm, Manufacturer_Part_Number=CC0805MKX5R8BB226, Mouser Price/Stock=https://www.mouser.co.uk/ProductDetail/YAGEO/CC0805KKX5R8BB106?qs=57cj7OiSijm89pM64t1AGQ%3D%3D
D1 D2: "8.5V Clamp 4.7A (8/20µs) Ipp Tvs Diode Surface Mount SOT-563", LCSC Part #=C460066, Manufacturer_Name="Diodes Incorporated", Mouser Part Number=621-DT1446-04V-7, Arrow Part Number=DT1446-04V-7, Arrow Price/Stock=https://www.arrow.com/en/products/dt1446-04v-7/diodes-incorporated, Datasheet Link=https://www.diodes.com//assets/Datasheets/DT1446-04V.pdf, Height=0.6mm, Manu Part #=DT1446-04V-7, Manufacturer_Part_Number=DT1446-04V-7, Mouser Price/Stock=https://www.mouser.co.uk/ProductDetail/Diodes-Incorporated/DT1446-04V-7?qs=5V6w%252Be2aIqaQkUd2yRdmdA%3D%3D
D3: "9.4A 18.6V 5.6V Bidirectional 5V SOD-523 ESD and Surge Protection (TVS/ESD) ROHS", LCSC Part #=C383211, Manufacturer_Name=LRC, Height=0.7mm, Manufacturer_Part_Number=LESD5D5.0CT1G
D4 D5: "80A 40V 500mV@3A 3A SMA(DO-214AC) Single Diodes RoHS", LCSC Part #=C85269, Manufacturer_Name=MCC, Mouser Part Number=833-SK34A-LTP, Arrow Part Number=SK34A-LTP, Arrow Price/Stock=https://www.arrow.com/en/products/sk34a-ltp/micro-commercial-components?utm_currency=USD&region=nac, Datasheet Link=https://mccsemi.com/pdf/Products/SK32A-L-SK310A-L(DO-214AC).pdf, Height=2.44mm, Manu Part #=SK34A-LTP, Manufacturer_Part_Number=SK34A-LTP, Mouser Price/Stock=https://www.mouser.co.uk/ProductDetail/Micro-Commercial-Components-MCC/SK34A-LTP?qs=JeAkOuORR2VPwzg48d%252BVAA%3D%3D
FB1 FB2: library part BLM18AG601SN1D, "380mΩ ±25% 600Ω@100MHz 0603 Ferrite Beads ROHS", LCSC Part #=C19330
IC1: "TSSOP-20 Brushless DC (BLDC) Motor Driver ROHS", LCSC Part #=C3036056, Manufacturer_Name="Texas Instruments", Mouser Part Number=595-DRV8300DPWR, Arrow Part Number=DRV8300DPWR, Arrow Price/Stock=https://www.arrow.com/en/products/drv8300dpwr/texas-instruments?utm_currency=USD&region=nac, Height=1.2mm, Manufacturer_Part_Number=DRV8300DPWR, Mouser Price/Stock=https://www.mouser.co.uk/ProductDetail/Texas-Instruments/DRV8300DPWR?qs=eP2BKZSCXI6qJbKdYnGwBg%3D%3D
IC2: "Low-power and high-precision analog output temperature sensor", LCSC Part #=C2859666, Manufacturer_Name="Texas Instruments", Mouser Part Number=595-TMP236A2DBZR, Arrow Part Number=TMP236A2DBZR, Arrow Price/Stock=https://www.arrow.com/en/products/tmp236a2dbzr/texas-instruments?region=nac, Datasheet Link=http://www.ti.com/lit/gpn/tmp236, Height=1.12mm, Manufacturer_Part_Number=TMP236A2DBZR, Mouser Price/Stock=https://www.mouser.co.uk/ProductDetail/Texas-Instruments/TMP236A2DBZR?qs=lc2O%252BfHJPVanftlPgPUvow%3D%3D
IC3: "Arm Cortex-M4 32-bit MCU+FPU, 170 MHz / 213 DMIPS, up to 128 KB Flash, 32 KB SRAM, rich analog, math accelerator", LCSC Part #=C529355, Manufacturer_Name=STMicroelectronics, Mouser Part Number=511-STM32G431CBT6, Arrow Part Number=STM32G431CBT6, Arrow Price/Stock=https://www.arrow.com/en/products/stm32g431cbt6/stmicroelectronics?utm_currency=USD&region=nac, Datasheet Link=https://www.st.com/resource/en/datasheet/stm32g431cb.pdf, Height=1.6mm, Manufacturer_Part_Number=STM32G431CBT6, Mouser Price/Stock=https://www.mouser.co.uk/ProductDetail/STMicroelectronics/STM32G431CBT6?qs=T3oQrply3y8OocyGDXq5wg%3D%3D
IC4: "500kHz 2A Buck Adjustable 596mV~28V 1 TSOT-23-6 Voltage Regulators - DC DC Switching Regulators RoHS", LCSC Part #=C527684, Manufacturer_Name="Texas Instruments", Mouser Part Number=595-TPS54202HDDCR, Arrow Part Number=TPS54202HDDCR, Arrow Price/Stock=https://www.arrow.com/en/products/tps54202hddcr/texas-instruments?utm_currency=USD&region=europe, Datasheet Link=http://www.ti.com/lit/gpn/tps54202h, Height=1.1mm, Manu Part #=TPS54202HDDCR, Manufacturer_Part_Number=TPS54202HDDCR, Mouser Price/Stock=https://www.mouser.co.uk/ProductDetail/Texas-Instruments/TPS54202HDDCR?qs=uP22XH7NdCtzy%252BOdxI8qhQ%3D%3D
J1: "SSL Connector 10 Position Adapter, Bridge Board to Board - Card Edge 0.079\" (2.00mm)"
J2: "3P 1x3P PH Tin -25℃~+85℃ White 2mm 100V 3 2A 1 Right Angle Through Hole,Right Angle,P=2mm Headers, Male Pins RoHS", LCSC Part #=C157929, Manu Part #=S3B-PH-K-S-(LF)(SN)
J3: "USB 2.0 3A 1 Surface Mount, Right Angle 16P Female -40℃~+85℃ Type-C SMD USB Connectors ROHS", LCSC Part #=C2988369, Manu Part #=GT-USB-7010ASV
L1: library part FTC303020D100MBCA, "2.5A 10uH ±20% 3.8A 135mΩ SMD,3x3mm Fixed Inductors RoHS", LCSC Part #=C7423323, Manu Part #=FTC303020D100MBCA
LED1: library part LTST-C150KGKT, "20mA 44.5mcd Water Clear -55℃~+85℃ 571nm Yellow Green 130° 75mW 2V 1206 LED Indication - Discrete ROHS", LCSC Part #=C125085, Manufacturer_Name=Lite-On, Mouser Part Number=859-LTST-C150KGKT, Arrow Part Number=LTST-C150KGKT, Arrow Price/Stock=https://www.arrow.com/en/products/ltst-c150kgkt/lite-on-technology?utm_currency=USD&region=nac, Datasheet Link=http://optoelectronics.liteon.com/upload/download/ds22-2000-072/ltst-c150kgkt.pdf, Height=1.2mm, Manu Part #=LTST-C150KGKT, Manufacturer_Part_Number=LTST-C150KGKT, Mouser Price/Stock=https://www.mouser.co.uk/ProductDetail/Lite-On/LTST-C150KGKT?qs=G7lFeYdtIHB%2FzaFKBwEyXw%3D%3D
Q1_1 Q1_2 Q1_3 Q2_1 Q2_2 Q2_3: "60V 117A 2.8mΩ@10V,15A 2V 1 N-Channel PowerPAKSO-8 MOSFETs ROHS", LCSC Part #=C467943
R1 R4_1 R4_2 R4_3: library part RC0603FR-074K7L, "100mW Thick Film Resistor 75V ±100ppm/℃ ±1% 4.7kΩ 0603 Chip Resistor - Surface Mount ROHS", LCSC Part #=C99782, Manufacturer_Name=YAGEO, Datasheet Link=https://www.mouser.com/catalog/specsheets/YAGEO_PYu_RC_Group_51_RoHS_L_12.pdf, Height=0.55mm, Manufacturer_Part_Number=RC0603FR-074K7L
R2 R6_1 R6_2 R6_3 R11 R15 R18: library part RC0603FR-071KL, "100mW Thick Film Resistor 75V ±100ppm/℃ ±1% 1kΩ 0603 Chip Resistor - Surface Mount ROHS", LCSC Part #=C22548, Manufacturer_Name=YAGEO, Datasheet Link=https://www.mouser.com/catalog/specsheets/YAGEO_PYu_RC_Group_51_RoHS_L_12.pdf, Height=0.55mm, Manufacturer_Part_Number=RC0603FR-071KL
R3_1 R3_2 R3_3 R5_1 R5_2 R5_3: library part RC0603FR-0722RL, "100mW Thick Film Resistor 75V ±100ppm/℃ ±1% 22Ω 0603 Chip Resistor - Surface Mount ROHS", LCSC Part #=C107701, Manufacturer_Name=YAGEO, Mouser Part Number=603-RC0603FR-0722RL, Arrow Part Number=RC0603FR-0722RL, Arrow Price/Stock=https://www.arrow.com/en/products/rc0603fr-0722rl/yageo?region=nac, Datasheet Link=http://www.farnell.com/datasheets/1868787.pdf, Height=0.55mm, Manufacturer_Part_Number=RC0603FR-0722RL, Mouser Price/Stock=https://www.mouser.co.uk/ProductDetail/YAGEO/RC0603FR-0722RL?qs=diQw95jMAeMOsxb8bne7fg%3D%3D
R7_1 R7_2 R7_3: library part PA2512FKF7T0R001E, "3W 1mΩ Surface Mount Current Sense Resistor ±100ppm/℃ ±1% 2512 Current Sense Resistors / Shunt Resistors ROHS", LCSC Part #=C723380
R8 R13 R16 R19: library part RC0603JR-070RL, "100mW Thick Film Resistor 75V ±5% 0Ω 0603 Chip Resistor - Surface Mount ROHS", LCSC Part #=C95177, Manufacturer_Name=YAGEO, Datasheet Link=https://www.mouser.com/catalog/specsheets/YAGEO_PYu_RC_Group_51_RoHS_L_12.pdf, Height=0.55mm, Manufacturer_Part_Number=RC0603JR-070RL
R9: library part RC0603FR-0710KL, "100mW 10kΩ 75V ±100ppm/℃ Thick Film Resistor ±1% 0603 Chip Resistor - Surface Mount RoHS", LCSC Part #=C98220, Manufacturer_Name=YAGEO, Datasheet Link=https://www.mouser.com/catalog/specsheets/YAGEO_PYu_RC_Group_51_RoHS_L_12.pdf, Height=0.55mm, Manufacturer_Part_Number=RC0603FR-0710KL
R10 R14 R17 R23: library part RC0603FR-07100KL, "100mW Thick Film Resistor 75V ±100ppm/℃ ±1% 100kΩ 0603 Chip Resistor - Surface Mount ROHS", LCSC Part #=C14675, Manufacturer_Name=YAGEO, Datasheet Link=https://www.mouser.com/catalog/specsheets/YAGEO_PYu_RC_Group_51_RoHS_L_12.pdf, Height=0.55mm, Manufacturer_Part_Number=RC0603FR-07100KL
R12: library part RC0603FR-07330RL, "100mW 330Ω 75V ±100ppm/℃ Thick Film Resistor ±1% 0603 Chip Resistor - Surface Mount RoHS", LCSC Part #=C105881, Manufacturer_Name=YAGEO, Datasheet Link=https://www.mouser.com/catalog/specsheets/YAGEO_PYu_RC_Group_51_RoHS_L_12.pdf, Height=0.55mm, Manu Part #=RC0603FR-07330RL, Manufacturer_Part_Number=RC0603FR-07330RL
R20 R21: library part RC0603FR-075K1L, "100mW 5.1kΩ 75V ±100ppm/℃ Thick Film Resistor ±1% 0603 Chip Resistor - Surface Mount RoHS", LCSC Part #=C105580, Manufacturer_Name=YAGEO, Datasheet Link=https://www.mouser.com/catalog/specsheets/YAGEO_PYu_RC_Group_51_RoHS_L_12.pdf, Height=0.55mm, Manufacturer_Part_Number=RC0603FR-075K1L
R22: library part RC0603FR-07510KL, "100mW 510kΩ 75V ±100ppm/℃ Thick Film Resistor ±1% 0603 Chip Resistor - Surface Mount RoHS", LCSC Part #=C114066, Manufacturer_Name=YAGEO, Datasheet Link=https://www.mouser.com/catalog/specsheets/YAGEO_PYu_RC_Group_51_RoHS_L_12.pdf, Height=0.55mm, Manu Part #=RC0603FR-07510KL, Manufacturer_Part_Number=RC0603FR-07510KL
R24: library part RC1206FR-070RL, "0Ω 250mW 200V Thick Film Resistor ±1% 1206 Chip Resistor - Surface Mount RoHS", LCSC Part #=C137394, Manufacturer_Name=YAGEO, Mouser Part Number=603-RC1206FR-070RL, Arrow Part Number=RC1206FR-070RL, Arrow Price/Stock=https://www.arrow.com/en/products/rc1206fr-070rl/yageo?region=nac, Datasheet Link=https://www.yageogroup.com/content/datasheet/asset/file/PYU-RC_GROUP_51_ROHS_L, Height=0.65mm, Manu Part #=RC1206FR-070RL, Manufacturer_Part_Number=RC1206FR-070RL, Mouser Price/Stock=https://www.mouser.co.uk/ProductDetail/YAGEO/RC1206FR-070RL?qs=%2FbpERZPLKKvgeF8VBtNQLg%3D%3D
R25: library part RC0603FR-0722K1L, "22.1kΩ 100mW 75V ±100ppm/℃ Thick Film Resistor ±1% 0603 Chip Resistor - Surface Mount RoHS", LCSC Part #=C137768, Manufacturer_Name=YAGEO, Datasheet Link=https://www.mouser.com/catalog/specsheets/YAGEO_PYu_RC_Group_51_RoHS_L_12.pdf, Height=0.55mm, Manufacturer_Part_Number=RC0603FR-0722K1L
S1: "Without Bracket 50mA 4mm 100,000 Cycles 12V 1.6N 3mm 2mm Round Button Surface Mount,Vertical SPST SMD Tactile Switches ROHS", LCSC Part #=C720477, Manu Part #=TS-1088-AR02016

## Free pads (board coordinates)
  rect 4x4 hole 2.7: 1(30.8,31.9) 2(30.8,26.2)
  rect 2.8x2.8 hole 1.8: 1(50.3,29.5) 2(50.3,17.5) 3(50.3,5.5)

## Via types
v1: diameter 0.45, hole 0.3, Top Layer (SIG) to Bottom Layer (SIG), tented both sides, 412 vias
v2: diameter 1, hole 0.6, Top Layer (SIG) to Bottom Layer (SIG), tented both sides, 1 vias

## Nets (pads, with @x,y where several pads share a name; then routed paths per layer and width w, separated by ;. In a path a pad name is that pad's centre, name@x,y a point inside that pad or via, vN(x,y) a via of type N, cw(c..) or ccw(c..) an arc to the next point about the centre after c; other vN are vias at no path point)
+3V3: C4.2 C10.2 C11.2 C12.2 C13.2 C14.2 C23.2 C24.2 C25.2 D1.5 D2.5 FB1.2 IC2.1 IC3.1 IC3.24 IC3.36 IC3.48 J1.5 L1.2 R23.2 | length 50.6
  Top Layer (SIG) w0.15: J1.5 5.4,10 v1(5.9,9.5) ; D1.5 8.619,5.2 8.819,5 v1(8.9,5)
  Top Layer (SIG) w0.3: v1(11.9,4.3) C12.2 12.141,5.381 12.581,5.381 13.013,5.813 13.013,6.15 IC3.48 ; v1(13.1,14.9) C13.2 14.245,14.635 14.245,14.293 14.95,13.588 IC3.36 ; IC3.1 14.95,3.25 C11.2 14.7,1.3 C10.2 14.8,1 v1(15.6,1) ; IC3.24 22.388,11.65 23.193,12.455 23.335,12.455 C14.2 23.61,12.71 24.59,12.71 v1(24.6,12.7) ; FB1.2 26.471,11.671 v1(27.271,11.671)
  Bottom Layer (SIG) w0.15: v1(5.9,9.5) D2.5 ; v1(30,1.5) 30.65,0.85 39.45,0.85 40.05,1.45 42.85,1.45 43.4,2 43.4,2.825 43.625,3.05 IC2.1@43.785,3.05 ; C4.2 43.56,3.275 IC2.1@43.785,3.05 ; IC2.1 IC2.1@43.785,3.05
  Bottom Layer (SIG) w0.3: L1.2@10.9,27.1 11.925,28.125 11.925,29.865 12.56,30.5 R23.2 20.67,30.43 20.67,29.17 C23.2
  other v1: 9,22.2 10.5,22.2 9,23.7 10.5,23.7 9,25.2 10.5,25.2 9,26.7 10.5,26.7
+3V3A: C16.2 C17.2 FB1.1 IC3.20 IC3.21 | length 5
  Top Layer (SIG) w0.3: IC3.20 IC3.21 23.59,10.15 C16.2 C17.2 25.02,10.18 FB1.1@26.38,10.18 ; C17.2@25.18,10.38 C17.2@25.2,10.4
ADC1_IN1: C6_3.2 IC3.8 R4_3.1 R6_3.2 | length 6.7
  Top Layer (SIG) w0.15: v1(18.3,5.7) 18.3,5.619 18.432,5.487 18.432,4.68 IC3.8
  Bottom Layer (SIG) w0.15: R4_3.1 R6_3.2 C6_3.2 17.2,4.955 17.888,5.643 18.243,5.643 v1(18.3,5.7)
ADC1_IN2: C6_2.2 IC3.9 R4_2.1 R6_2.2 | length 5.4
  Top Layer (SIG) w0.15: IC3.9 18.95,5.474 19.176,5.7 v1(19.2,5.7)
  Bottom Layer (SIG) w0.15: v1(19.2,5.7) 19.2,5.619 19.405,5.414 19.405,5.195 19.8,4.8 21.36,4.8 R6_2.2 22.7,4.84 R4_2.1
ADC1_IN5: C6_1.2 IC3.28 R4_1.1 R6_1.2 | length 5
  Top Layer (SIG) w0.15: v1(18.807,11.907) 18.807,11.988 18.95,12.131 IC3.28
  Bottom Layer (SIG) w0.15: C6_1.2 18.153,11.907 v1(18.807,11.907)
  Bottom Layer (SIG) w0.2: C6_1.2 17.96,13.36 R6_1.2 R4_1.1
ADC1_IN10: C3.2 IC3.5 R1.1 R2.2 | length 6.9
  Top Layer (SIG) w0.15: v1(16.9,5.9) 16.925,5.875 16.925,4.687 IC3.5
  Bottom Layer (SIG) w0.15: R1.1 15.05,10.625 16.175,9.5 16.175,8.75 16.825,8.1 16.825,7.115 C3.2 16.9,6.96 v1(16.9,5.9)
ADC1_IN11: IC2.2 IC3.26 | length 31.3
  Top Layer (SIG) w0.15: v1(19.7,11.6) 19.7,12.107 19.95,12.357 IC3.26
  Int2 (PWR) w0.15: v1(19.7,11.6) 19.7,10.7 v1(20.2,10.2)
  Int3 (SIG) w0.15: v1(20.2,10.2) 20.257,10.2 29.757,0.7 v1(29.8,0.7)
  Bottom Layer (SIG) w0.15: v1(29.8,0.7) 29.881,0.7 30.081,0.5 39.6,0.5 40.2,1.1 43.9,1.1 IC2.2
ADC2_IN10: IC3.6 R8.2 | length 2
  Top Layer (SIG) w0.2: IC3.6 17.45,2.75 R8.2
ADC2_IN15: IC3.29 R13.2 | length 4.7
  Top Layer (SIG) w0.15: v1(18.1,10.9) 18.1,11.907 18.45,12.257 IC3.29
  Bottom Layer (SIG) w0.15: v1(18.1,10.9) 18.1,10.825 19.625,9.3 R13.2
ADC2_IN17: IC3.12 R16.2 | length 2.7
  Top Layer (SIG) w0.15: IC3.12 20.45,5.569 20.6,5.719 v1(20.6,5.8)
  Bottom Layer (SIG) w0.15: v1(20.6,5.8) 21.2,6.4 R16.2
AGND: C16.1 C17.1 IC3.19 R19.1 | length 4.7
  Top Layer (SIG) w0.3: IC3.19 22.683,9.15 22.856,8.977 23.463,8.977 C16.1 C17.1 R19.1@26.46,8.84 ; C17.1@25.26,9.04 C17.1@25.3,9
DGND: C3.1 C4.1 C6_1.1 C6_2.1 C6_3.1 C7.1 C10.1 C11.1 C12.1 C13.1 C14.1 D1.2 D2.2 IC2.3 IC3.23 IC3.35 IC3.47 J1.1 J2.3 LED1.1 R2.1 R6_1.1 R6_2.1 R6_3.1 R9.1 R11.1 R15.1 R18.1 R19.2 R24.2 S1.1 | length 23.1
  Top Layer (SIG) w0.15: v1(5.4,5) 5.6,5.2 D1.2
  Top Layer (SIG) w0.3: C12.1 12.09,6.65 IC3.47 ; C13.1 15.45,14.75 IC3.35 ; IC3.23 23.35,11.15 C14.1
  Bottom Layer (SIG) w0.15: D2.2 8.874,9.5 9.074,9.7 v1(9.1,9.7) ; C7.1 19.8,2.28 19.8,3.48 20.04,3.24 R6_2.1 ; v1(32.2,1.9) 32.9,1.2 39.2,1.2 39.8,1.8 41.225,1.8 41.75,2.325 42.24,2.325 C4.1
  other v1: 17.8,9.7 16.6,10.8
NetC5_1_1: C5_1.1 IC1.12 pad.1@50.3,29.5 Q1_1.1 Q1_1.2 Q1_1.3 Q2_1.5 Q2_1.6 Q2_1.7 Q2_1.8 R4_1.2 | length 36.3
  Top Layer (SIG) w0.3: v1(42.3,23.8) 42.329,23.829 42.739,23.829 45.21,26.3 Q2_1.8@45.21,26.5
  Int3 (SIG) w0.3: v1(24.8,15) 25.1,15.3 25.1,19.213 26.962,21.075 v1(31.894,21.075) ; v1@31.894,21.006 31.963,21.075 35.375,21.075 38.1,23.8 v1(42.3,23.8)
  Bottom Layer (SIG) w0.3: R4_1.2 20.957,14.8 21.332,14.425 24.225,14.425 v1(24.8,15) ; IC1.12 29.175,20.55 30.535,20.55 31.145,21.16 C5_1.1 31.331,21.029 31.406,21.104 31.865,21.104 v1(31.894,21.075)
  other v1: 43.35,24.1 44.6,24.1 45.85,24.1 47.1,24.1 48.35,24.1 49.6,24.1 50.85,24.1 43.35,25.35 44.6,25.35 45.85,25.35 47.1,25.35 48.35,25.35 49.6,25.35 50.85,25.35 43.35,26.6 44.6,26.6 45.85,26.6 47.1,26.6 48.35,26.6 49.6,26.6 50.85,26.6 43.35,27.85 44.6,27.85 45.85,27.85 47.1,27.85 48.35,27.85 49.6,27.85 50.85,27.85 47.1,29.1 48.35,29.1 47.1,30.35 48.35,30.35 47.1,31.6 48.35,31.6 49.6,31.6 50.85,31.6 47.1,32.85 48.35,32.85 49.6,32.85 50.85,32.85 49.6,34.1 50.85,34.1
NetC5_1_2: C5_1.2 IC1.14 | length 2.4
  Bottom Layer (SIG) w0.3: IC1.14 29.175,19.25 29.995,19.25 30.32,19.575 30.935,19.575 C5_1.2
NetC5_2_1: C5_2.1 IC1.15 pad.2@50.3,17.5 Q1_2.1 Q1_2.2 Q1_2.3 Q2_2.5 Q2_2.6 Q2_2.7 Q2_2.8 R4_2.2 | length 35.4
  Top Layer (SIG) w0.3: v1(40.722,17.626) 42.584,17.626 45.21,15 Q2_2.8@45.21,14.8
  Int2 (PWR) w0.3: v1(28.985,12.122) 28.985,14.585 v1(32.4,18)
  Int3 (SIG) w0.3: v1(26.4,5) 28.985,7.585 v1(28.985,12.122) ; v1(32.4,18) 40.308,18 40.681,17.626 v1(40.722,17.626)
  Bottom Layer (SIG) w0.3: R4_2.2 26.14,4.74 v1(26.4,5) ; IC1.15 29.118,18.543 31.183,18.543 C5_2.1 31.465,18.295 32.064,18.295 32.359,18 v1(32.4,18)
  other v1: 44.55,12.85 45.8,12.85 47.05,12.85 48.3,12.85 49.55,12.85 50.8,12.85 44.55,14.1 45.8,14.1 47.05,14.1 48.3,14.1 49.55,14.1 50.8,14.1 44.55,15.35 45.8,15.35 47.05,15.35 48.3,15.35 49.55,15.35 50.8,15.35 44.55,16.6 45.8,16.6 47.05,16.6 48.3,16.6 47.05,17.85 48.3,17.85 47.05,19.1 48.3,19.1 49.55,19.1 50.8,19.1 47.05,20.35 48.3,20.35 49.55,20.35 50.8,20.35 49.55,21.6 50.8,21.6
NetC5_2_2: C5_2.2 IC1.17 | length 2.1
  Bottom Layer (SIG) w0.3: IC1.17 29.108,17.233 31.193,17.233 C5_2.2
NetC5_3_1: C5_3.1 IC1.18 pad.3 Q1_3.1 Q1_3.2 Q1_3.3 Q2_3.5 Q2_3.6 Q2_3.7 Q2_3.8 R4_3.2 | length 43.1
  Top Layer (SIG) w0.3: v1(41,5.7) 42.71,5.7 45.21,3.2 Q2_3.8@45.21,3
  Int2 (PWR) w0.3: v1(22.2,2.3) 22.2,3.795 31.105,12.7 v1(32.4,12.7)
  Int3 (SIG) w0.3: v1(32.4,12.7) 32.4,11.7 38.4,5.7 v1(41,5.7)
  Bottom Layer (SIG) w0.3: R4_3.2 20.7,0.8 v1(22.2,2.3) ; IC1.18 29.175,16.5 30.005,16.5 30.28,16.225 30.99,16.225 31.81,15.405 31.815,15.405 32.4,14.82 v1(32.4,12.7)
  other v1: 45.85,1.6 47.1,1.6 48.35,1.6 49.6,1.6 50.85,1.6 45.85,2.85 47.1,2.85 48.35,2.85 49.6,2.85 50.85,2.85 44.6,4.1 45.85,4.1 47.1,4.1 48.35,4.1 47.1,5.35 48.35,5.35 47.1,6.6 48.35,6.6 47.1,7.85 48.35,7.85 49.6,7.85 50.85,7.85 47.1,9.1 48.35,9.1 49.6,9.1 50.85,9.1 49.6,10.35 50.85,10.35
NetC5_3_2: C5_3.2 IC1.20 | length 2.4
  Bottom Layer (SIG) w0.3: IC1.20 29.175,15.2 29.7,15.2 30.26,14.64 C5_3.2
NetC18_2: C18.2 D3.2 FB2.1 J3.A4B9 J3.B4A9 | length 11.4
  Top Layer (SIG) w0.4: J3.B4A9 7.5,26.7 8.186,26.7 8.42,26.934 8.42,28.6 ; J3.A4B9 7.5,31.3 8.186,31.3 8.42,31.066 8.42,28.6 ; v2@9.4,28.6 8.42,28.6
  Bottom Layer (SIG) w0.4: v2(9.3,28.6) 9.34,28.64 9.34,31 C18.2 9.42,31.12 9.42,32.48 FB2.1
NetC20_1: C20.1 IC4.2 L1.1 | length 3.2
  Bottom Layer (SIG) w0.3: IC4.2 19.725,26.575 20.225,26.575 20.84,25.96 C20.1
  other v1: 12.2,24.4 13.3,24.4 12.2,25.3 13.3,25.3 12.2,26.2 13.3,26.2 17.9,26.4 18.6,26.4 17.9,27 18.6,27 12.2,27.1 13.3,27.1
NetC20_2: C20.2 IC4.6 | length 1.5
  Bottom Layer (SIG) w0.3: C20.2 22.16,25.71 IC4.6
NetC21_2: C21.2 C22.2 D4.1 D5.1 IC4.3 R22.2 | length 5.3
  Int3 (SIG) w0.3: v1(20.648,27.45) v1(23.005,25.092)
  Bottom Layer (SIG) w0.3: IC4.3@19.65,27.65 20.407,27.65 20.607,27.45 v1(20.648,27.45) ; v1(23.005,25.092) 23.009,25.096 23.896,25.096 R22.2
NetC23_1: C23.1 IC4.4 R23.1 R25.2 | length 4.8
  Bottom Layer (SIG) w0.3: R23.1 22.13,30.43 22.13,29.17 C23.1 22.06,27.775 22.185,27.65 IC4.4 23.225,27.65 R25.2@23.775,28.2
NetIC1_9: IC1.9 R5_1.1 | length 6.1
  Top Layer (SIG) w0.3: v1(24.9,20.5) 26.487,20.5 26.674,20.313 27.487,19.5 R5_1.1
  Bottom Layer (SIG) w0.3: IC1.9 23.313,20.487 24.887,20.487 v1(24.9,20.5)
NetIC1_10: IC1.10 R5_2.1 | length 2.8
  Top Layer (SIG) w0.3: R5_2.1 24.15,22.15 24.15,21.45 v1(24.5,21.1)
  Bottom Layer (SIG) w0.3: IC1.10 23.313,21.113 24.487,21.113 v1(24.5,21.1)
NetIC1_11: IC1.11 R5_3.1 | length 5.3
  Top Layer (SIG) w0.3: R5_3.1 25.9,19.2 v1(26.3,19.6)
  Bottom Layer (SIG) w0.3: v1(26.3,19.6) 26.3,20.4 27.013,21.113 29.088,21.113 IC1.11
NetIC1_13: IC1.13 R3_1.1 | length 4
  Top Layer (SIG) w0.3: v1(27.4,20.4) 27.429,20.429 27.429,22.229 R3_1.1
  Bottom Layer (SIG) w0.3: v1(27.4,20.4) 27.9,19.9 29.025,19.9 IC1.13
NetIC1_16: IC1.16 R3_2.1 | length 2.6
  Top Layer (SIG) w0.3: v1(27.807,17.975) 28.925,17.975 R3_2.1
  Bottom Layer (SIG) w0.3: v1(27.807,17.975) 27.835,17.946 29.029,17.946 IC1.16
NetIC1_19: IC1.19 R3_3.1 | length 2.4
  Top Layer (SIG) w0.3: v1(27.8,16.275) 27.841,16.275 28.216,15.9 R3_3.1
  Bottom Layer (SIG) w0.3: v1(27.8,16.275) 27.841,16.275 28.116,16 28.5,16 28.55,15.95 IC1.19@28.55,15.9
NetIC3_45: IC3.45 R9.2 | length 3.2
  Top Layer (SIG) w0.15: R9.2 10.5,7.5 12.407,7.5 12.557,7.65 IC3.45
NetIC4_5: IC4.5 R22.1 | length 1.8
  Bottom Layer (SIG) w0.3: IC4.5@22.15,26.7 R22.1
NetJ3_A5: J3.A5 R20.2 | length 3.6
  Top Layer (SIG) w0.15: v1(5.7,31) 6.45,30.25 J3.A5
  Bottom Layer (SIG) w0.15: R20.2 5.2,31.5 v1(5.7,31)
NetJ3_B5: J3.B5 R21.2 | length 3.4
  Top Layer (SIG) w0.15: v1(5.7,27.2) 5.725,27.225 7.375,27.225 J3.B5
  Bottom Layer (SIG) w0.15: R21.2 5,26.5 v1(5.7,27.2)
NetLED1_2: LED1.2 R12.2 | length 1.6
  Top Layer (SIG) w0.15: R12.2 LED1.2
NetQ1_1_4: Q1_1.4 R3_1.2 | length 25.1
  Top Layer (SIG) w0.3: R3_1.2 29.4,22.2 v1(30.3,22.2) ; v1(46.5,33.2) 46.975,33.675 47.275,33.675 Q1_1.4
  Int3 (SIG) w0.3: v1(30.3,22.2) 33.887,22.2 40.687,29 45.5,29 46.5,30 v1(46.5,33.2)
NetQ1_2_4: Q1_2.4 R3_2.2 | length 19.4
  Top Layer (SIG) w0.3: R3_2.2 30.6,17.975 30.85,18.225 30.925,18.225 31.4,18.7 32.159,18.7 32.359,18.9 v1(32.4,18.9) ; v1(46,23.1) 46.029,23.071 46.474,23.071 47.275,22.27 Q1_2.4
  Int3 (SIG) w0.3: v1(32.4,18.9) 34.9,18.9 38.725,22.725 43.205,22.725 43.58,23.1 v1(46,23.1)
NetQ1_3_4: Q1_3.4 R3_3.2 | length 20.3
  Top Layer (SIG) w0.3: R3_3.2 v1(32.2,15.9) ; v1(45.9,11.3) 45.929,11.271 46.404,11.271 47.275,10.4 Q1_3.4
  Int3 (SIG) w0.3: v1(32.2,15.9) 32.2,13.8 34.7,11.3 v1(45.9,11.3)
NetQ2_1_4: Q2_1.4 R5_1.2 | length 13.2
  Top Layer (SIG) w0.3: R5_1.2 32.459,19.5 32.759,19.8 v1(32.8,19.8) ; v1(38.1,24.5) 41.6,24.5 Q2_1.4
  Int2 (PWR) w0.3: v1(32.8,19.8) 32.829,19.829 33.429,19.829 v1(38.1,24.5)
NetQ2_2_4: Q2_2.4 R5_2.2 | length 23.3
  Top Layer (SIG) w0.3: R5_2.2 25.6,22.3 v1(25.6,21.4) ; v1(37.9,12.7) 37.929,12.729 41.529,12.729 Q2_2.4
  Int3 (SIG) w0.3: v1(27,17.9) 27.8,17.1 32.8,17.1 33.3,16.6 33.3,14.5 35.1,12.7 v1(37.9,12.7)
  Bottom Layer (SIG) w0.3: v1(25.6,21.4) 25.6,19.3 v1(27,17.9)
NetQ2_3_4: Q2_3.4 R5_3.2 | length 28.3
  Top Layer (SIG) w0.3: R5_3.2 25.975,16.8 26.225,16.55 26.225,16.016 26.5,15.741 v1(26.5,15.7) ; v1(40.404,0.596) 40.444,0.596 40.723,0.875 41.475,0.875 Q2_3.4
  Int3 (SIG) w0.3: v1(26.5,15.7) 30,12.2 30,3.287 32.69,0.596 v1(40.404,0.596)
NRST: C7.2 D1.6 IC3.7 J1.4 S1.2 | length 24.3
  Top Layer (SIG) w0.15: J1.4 5.499,8 7.874,5.625 ; S1.2 6.62,2.065 7.7,3.145 7.7,5.451 7.874,5.625 ; v1(9,5.7) D1.6 8.159,5.625 7.874,5.625 ; IC3.7 17.95,3.831 18.1,3.681 v1(18.1,3.6)
  Int3 (SIG) w0.15: v1(9,5.7) 16,5.7 v1(18.1,3.6)
  Bottom Layer (SIG) w0.15: v1(18.1,3.6) 18.1,3.564 18.4,3.264 C7.2
OPAMP1_VINM: C8.1 IC3.11 R10.1 R11.2 | length 5.5
  Top Layer (SIG) w0.15: IC3.11 19.95,3.165 20.36,2.755 C8.1 20.36,1.24 R10.1 R11.2
OPAMP1_VINP: IC3.15 Q2_3.1 Q2_3.2 Q2_3.3 R7_3.2 | length 20.2
  Top Layer (SIG) w0.15: IC3.15 25.55,7.15 v1(26.6,6.1)
  Int2 (PWR) w0.3: v1(26.6,6.1) 32.2,0.5 36.587,0.5 37.164,1.077 37.164,1.164 v1(38.5,2.5)
OPAMP1_VOUT: C8.2 IC3.10 R8.1 R10.2 | length 5.2
  Top Layer (SIG) w0.15: R8.1 R10.2 19.04,1.24 C8.2 19.38,3.04 19.38,3.581 19.45,3.651 IC3.10
OPAMP2_VINM: C9.1 IC3.13 R14.1 R15.2 | length 5.8
  Top Layer (SIG) w0.15: IC3.13 22.388,6.15 23.358,5.18 23.46,5.18 C9.1 24.885,4.84 25.325,4.4 R14.1 25.4,2.9 R15.2
OPAMP2_VINP: IC3.16 Q2_2.1 Q2_2.2 Q2_2.3 R7_2.2 | length 17.8
  Top Layer (SIG) w0.15: IC3.16 21.963,7.625 26.875,7.625 v1(26.9,7.6)
  Int2 (PWR) w0.3: v1(26.9,7.6) 27.7,7.6 31.4,11.3 37.3,11.3 v1(37.9,11.9)
OPAMP2_VOUT: C9.2 IC3.14 R13.1 R14.2 | length 6.4
  Top Layer (SIG) w0.15: v1(20.863,6.9) 21.113,6.65 IC3.14 22.013,6.575 22.69,6.575 23.105,6.16 C9.2 25.24,6.16 R14.2
  Bottom Layer (SIG) w0.15: R13.1 19.775,7.7 20.518,6.957 20.806,6.957 v1(20.863,6.9)
OPAMP3_VINM: C15.1 IC3.18 R17.1 R18.2 | length 5.5
  Top Layer (SIG) w0.15: v1(20.85,8.9) 20.863,8.9 21.113,8.65 IC3.18
  Bottom Layer (SIG) w0.15: v1(20.85,8.9) 21.11,9.16 C15.1 22.07,9.23 23.53,9.23 R17.1 R18.2
OPAMP3_VINP: IC3.27 Q2_1.1 Q2_1.2 Q2_1.3 R7_1.2 | length 27.9
  Top Layer (SIG) w0.15: IC3.27 19.525,13.213 19.525,13.852 19.87,14.197 25.097,14.197 v1(25.5,14.6)
  Top Layer (SIG) w0.3: v1(37.7,25.2) 37.741,25.2 37.891,25.35 38.1,25.35 39.2,26.45 R7_1.2
  Int2 (PWR) w0.3: v1(32.3,20.4) 37.1,25.2 v1(37.7,25.2)
  Int3 (SIG) w0.3: v1(25.5,14.6) 25.9,15 25.9,18 27.7,19.8 31.7,19.8 v1(32.3,20.4)
OPAMP3_VOUT: C15.2 IC3.17 R16.1 R17.2 | length 5.3
  Top Layer (SIG) w0.15: v1(20.9,8) 20.976,8 21.126,8.15 IC3.17
  Bottom Layer (SIG) w0.15: v1(20.9,8) 20.941,8 21.101,7.84 C15.2 22.07,7.77 23.53,7.77 R17.2 23.5,7.6 R16.1
PGND: C1.2 C2.2 C18.1 C19.1 C21.1 C22.1 C24.1 C25.1 D3.1 IC1.8 IC4.1 J3.1 J3.2 J3.3 J3.4 J3.A1B12 J3.B1A12 pad.2@30.8,26.2 R7_1.1 R7_2.1 R7_3.1 R20.1 R21.1 R24.1 R25.1 | length 5.8
  Top Layer (SIG) w0.4: J3.2 6.98,24.88 6.98,25.7 7.08,25.8 J3.B1A12 ; J3.1 6.98,33.12 6.98,32.3 7.08,32.2 J3.A1B12
  Bottom Layer (SIG) w0.3: C1.2@21.125,21 21.225,21 22.325,19.9 23.225,19.9 IC1.8
  other v1: 33.6,2.1 34.6,2.1 35.6,2.1 36.6,2.1 33.6,3.1 34.6,3.1 35.6,3.1 36.6,3.1 33.6,4.1 34.6,4.1 35.6,4.1 36.6,4.1 33.6,5.1 34.6,5.1 35.6,5.1 36.6,5.1 33.6,6.1 34.6,6.1 35.6,6.1 36.6,6.1 33.6,7.1 34.6,7.1 35.6,7.1 33.6,8.1 34.6,8.1 33.6,9.1 36.6,9.1 35.6,10.1 36.6,10.1 35.6,12.1 36.6,12.1 34.6,14.1 35.6,14.1 36.6,14.1 34.6,15.1 35.6,15.1 36.6,15.1 34.6,16.1 35.6,16.1 36.6,16.1 34.6,17.1 35.6,17.1 36.6,17.1 36.6,19.1 34.6,20.1 1.6,21.1 3.1,21.1 4.6,21.1 6.1,21.1 7.6,21.1 12.1,21.1 16.6,21.1 18.1,21.1 19.6,21.1 34.607,21.893 2.35,22.6 3.85,22.6 5.35,22.6 14.35,22.6 15.85,22.6 17.35,22.6 18.85,22.6 20.35,22.6 21.85,22.6 33.6,23.1 4.6,24.1 16.6,24.1 18.1,24.1 19.6,24.1 33.6,24.1 34.6,24.1 33.6,25.1 34.6,25.1 35.6,25.1 5.35,25.6 33.6,26.1 34.6,26.1 35.6,26.1 36.6,26.1 1.6,27.1 33.6,27.1 34.6,27.1 35.6,27.1 36.6,27.1 33.6,28.1 34.6,28.1 35.6,28.1 36.6,28.1 2.35,28.6 3.85,28.6 5.35,28.6 1.6,30.1 3.1,30.1 4.6,30.1 4.6,33.1
STAT_LEDG: IC3.42 R12.1 | length 6.2
  Top Layer (SIG) w0.15: v1(11.6,12.5) 11.6,12.581 11.8,12.781 R12.1 ; v1(12.1,9.4) 12.181,9.4 12.431,9.15 IC3.42
  Int3 (SIG) w0.15: v1(11.6,12.5) 11.6,9.9 v1(12.1,9.4)
SYS_SWCLK: D2.4 IC3.38 J1.9 | length 12.3
  Top Layer (SIG) w0.15: v1(7.6,9) 9.75,11.15 IC3.38
  Bottom Layer (SIG) w0.15: J1.9 5.67,8 6.67,9 D2.4 v1(7.6,9)
SYS_SWDIO: D2.3 IC3.37 J1.8 | length 13.3
  Top Layer (SIG) w0.15: v1(12.3,11.7) 12.325,11.675 13.437,11.675 IC3.37
  Bottom Layer (SIG) w0.15: J1.8 5.338,6 8.338,9 D2.3 9.6,9 v1(12.3,11.7)
SYS_SWO: D2.6 IC3.40 J1.10 | length 11.3
  Top Layer (SIG) w0.15: v1(10,10.4) 12.573,10.4 12.748,10.225 13.387,10.225 IC3.40
  Bottom Layer (SIG) w0.15: J1.10 D2.6 6.841,10.075 7.075,10.075 7.425,10.425 9.975,10.425 v1(10,10.4)
TIM1_CH1: IC1.1 IC3.30 | length 6.7
  Top Layer (SIG) w0.15: IC3.30 18.025,13.213 18.025,14.025 19,15 v1(22.1,15)
  Bottom Layer (SIG) w0.15: v1(22.1,15) 22.35,15.25 23.275,15.25 IC1.1
TIM1_CH1N: IC1.4 IC3.2 | length 17.2
  Top Layer (SIG) w0.15: IC3.2 15.45,5.908 15.8,6.258 v1(15.8,6.3)
  Int3 (SIG) w0.15: v1(15.8,6.3) 15.8,6.793 23.2,14.193 23.2,15.3 v1(24.5,16.6)
  Bottom Layer (SIG) w0.15: IC1.4 23.45,17.075 24.164,17.075 24.443,16.796 24.443,16.657 v1(24.5,16.6)
TIM1_CH2: IC1.2 IC3.31 | length 7.8
  Top Layer (SIG) w0.15: IC3.31 17.525,13.213 17.525,14.525 18.9,15.9 v1(22.1,15.9)
  Bottom Layer (SIG) w0.15: v1(22.1,15.9) 23.275,15.9 IC1.2
TIM1_CH2N: IC1.5 IC3.34 | length 10.3
  Top Layer (SIG) w0.15: IC3.34 16.025,13.213 16.025,14.825 19,17.8 v1(21.9,17.8)
  Bottom Layer (SIG) w0.15: v1(21.9,17.8) 23.225,17.8 IC1.5
TIM1_CH3: IC1.3 IC3.32 | length 9
  Top Layer (SIG) w0.15: IC3.32 17.025,13.213 17.025,14.925 19,16.9 v1(22,16.9)
  Bottom Layer (SIG) w0.15: v1(22,16.9) 22.025,16.9 22.325,16.6 23.275,16.6 IC1.3
TIM1_CH3N: IC1.6 IC3.46 | length 18.2
  Top Layer (SIG) w0.15: IC3.46 14.35,7.15 v1(14.8,7.6)
  Bottom Layer (SIG) w0.15: v1(14.8,7.6) 14.8,8.336 14.25,8.886 14.25,12.514 20.036,18.3 21.381,18.3 21.606,18.525 IC1.6
USART1_RX: D1.3 IC3.44 J1.2 | length 12.6
  Top Layer (SIG) w0.15: J1.2 5.77,4 D1.3@6.47,4.7 ; D1.3 7.019,4.7 7.119,4.8 v1(7.2,4.8) ; v1(12.2,8) 12.281,8 12.431,8.15 IC3.44
  Bottom Layer (SIG) w0.15: v1(7.2,4.8) 10.4,8 v1(12.2,8)
USART1_TX: D1.1 IC3.43 J1.3 | length 12.4
  Top Layer (SIG) w0.15: J1.3 2.8,5.7 6.954,5.7 7.108,5.546 v1(7.189,5.546) ; v1(11.793,8.507) 11.874,8.507 12.017,8.65 IC3.43
  Bottom Layer (SIG) w0.15: v1(7.189,5.546) 10.15,8.507 v1(11.793,8.507)
USART3_RX: IC3.25 J2.1 | length 17.3
  Top Layer (SIG) w0.15: v1(20.3,12) 20.3,12.081 20.45,12.231 IC3.25
  Int3 (SIG) w0.2: J2.1@6.5,17.5 14.8,17.5 v1(20.3,12)
USART3_TX: IC3.22 J2.2 | length 17.4
  Top Layer (SIG) w0.15: v1(18.9,11) 18.936,11 19.236,10.7 21.888,10.7 IC3.22
  Int3 (SIG) w0.2: J2.2@6.5,15.5 14.4,15.5 v1(18.9,11)
VBATT: C1.1 C2.1 D4.2 IC1.7 pad.1@30.8,31.9 Q1_1.5 Q1_1.6 Q1_1.7 Q1_1.8 Q1_2.5 Q1_2.6 Q1_2.7 Q1_2.8 Q1_3.5 Q1_3.6 Q1_3.7 Q1_3.8 R1.2 | length 29.5
  Int2 (PWR) w0.3: v1(24.5,19.2) 24.5,19.217 23.925,19.792 23.925,28.965 C2.1
  Bottom Layer (SIG) w0.15: R1.2 13.45,12.55 19.865,18.965 20.565,18.965 C1.1
  Bottom Layer (SIG) w0.3: C1.1 21.182,19.218 23.257,19.218 IC1.7 23.313,19.187 24.487,19.187 v1(24.5,19.2)
  other v1: 43.6,6.1 44.6,6.1 45.6,6.1 38.6,7.1 39.6,7.1 40.6,7.1 41.6,7.1 42.6,7.1 43.6,7.1 44.6,7.1 45.6,7.1 38.6,8.1 39.6,8.1 40.6,8.1 41.6,8.1 42.6,8.1 43.6,8.1 44.6,8.1 45.6,8.1 38.6,9.1 39.6,9.1 40.6,9.1 41.6,9.1 42.6,9.1 43.6,9.1 44.6,9.1 45.6,9.1 38.6,10.1 39.6,10.1 40.6,10.1 41.6,10.1 42.6,10.1 43.6,10.1 44.6,10.1 45.6,10.1 43.6,18.1 44.6,18.1 45.6,18.1 38.6,19.1 39.6,19.1 40.6,19.1 41.6,19.1 42.6,19.1 43.6,19.1 44.6,19.1 45.6,19.1 38.6,20.1 39.6,20.1 40.6,20.1 41.6,20.1 42.6,20.1 43.6,20.1 44.6,20.1 45.6,20.1 38.6,21.1 39.6,21.1 40.6,21.1 41.6,21.1 42.6,21.1 43.6,21.1 44.6,21.1 45.6,21.1 41.6,22.1 42.6,22.1 43.6,22.1 44.6,22.1 45.6,22.1 38.6,30.1 39.6,30.1 40.6,30.1 41.6,30.1 42.6,30.1 43.6,30.1 44.6,30.1 45.6,30.1 38.6,31.1 39.6,31.1 40.6,31.1 41.6,31.1 42.6,31.1 43.6,31.1 44.6,31.1 45.6,31.1 38.6,32.1 39.6,32.1 40.6,32.1 41.6,32.1 42.6,32.1 43.6,32.1 44.6,32.1 45.6,32.1 38.6,33.1 39.6,33.1 40.6,33.1 41.6,33.1 42.6,33.1 43.6,33.1 44.6,33.1 45.6,33.1 38.6,34.1 39.6,34.1 40.6,34.1 41.6,34.1 42.6,34.1 43.6,34.1 44.6,34.1 45.6,34.1
VBUS_USB: C19.2 D5.2 FB2.2 | length 4.5
  Bottom Layer (SIG) w0.4: FB2.2 9.42,33.88 10.98,33.88 C19.2 12.475,33.86 13.31,33.025 D5.2
pads on no net: D1.4 D2.1 IC3.3 IC3.4 IC3.33 IC3.39 IC3.41 J1.6 J1.7 J3.A6 J3.A7 J3.A8 J3.B6 J3.B7 J3.B8 J3.Un1 J3.Un2

## Polygon pours and split planes (outlines as drawn)
DGND on Top Layer (SIG) "NONET_L-01_P-001" (solid, pour order 109): 0,19.5 0,1.27 ccw(c1.27,1.27) 1.27,0 33,0 33,19.5